# Altium PCB PCB1.PcbDoc (part 1 of 3)
Units mil, origin at the board's own origin, x right, y up, seen from the top; angles counter-clockwise.
Board outline 1649.96 x 1854.5 mil, 6 copper layers (Top Layer, Layer 2, Layer 3, Layer 4, Layer 5, Bottom Layer), stack 32.112 mil thick; 86 components, 196 nets, 681 pads, 452 vias.
Unrouted connection lines stored in the file: 66.
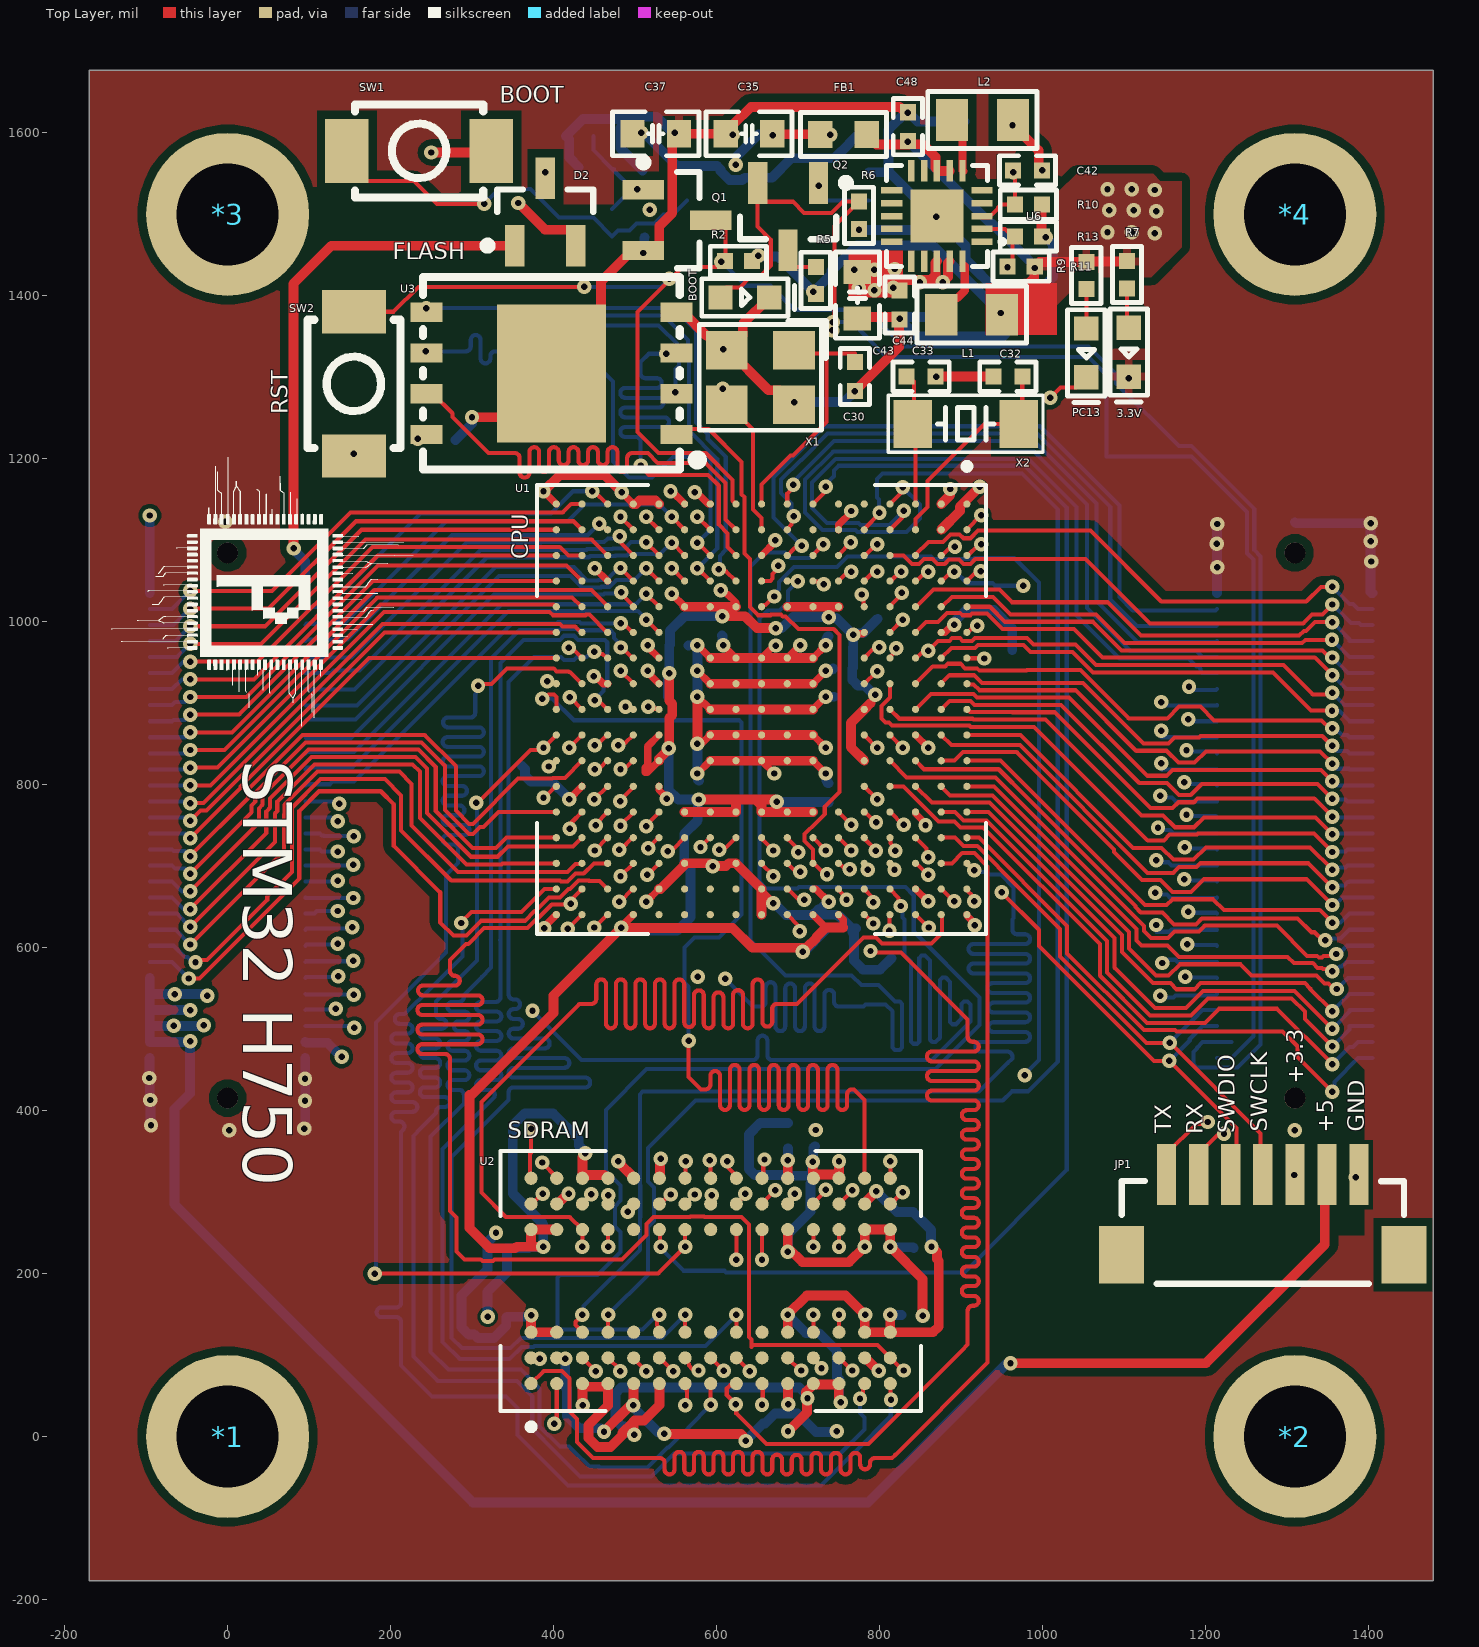
[diagram p0: Top Layer view]
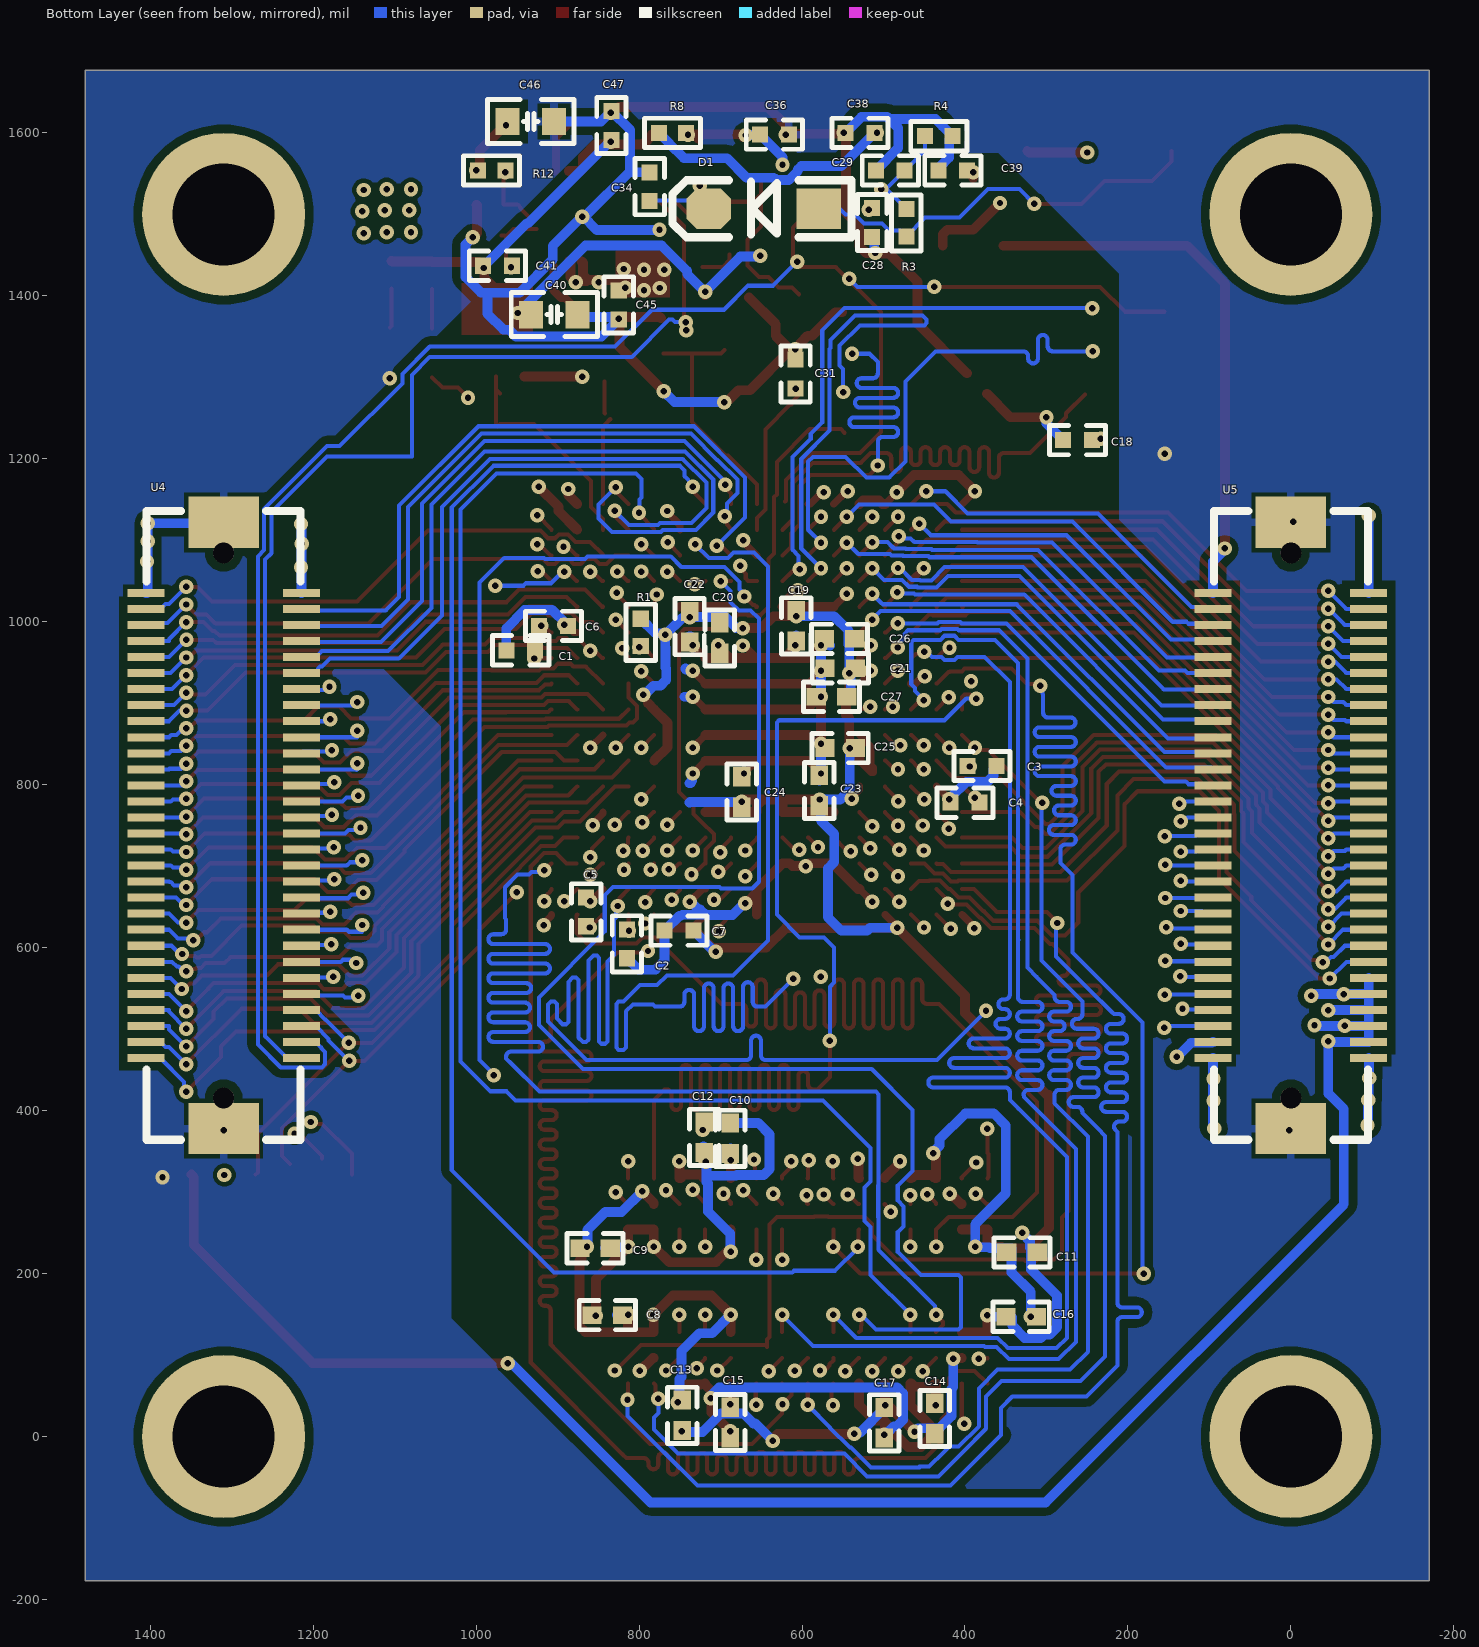
[diagram p1: Bottom Layer view, seen from below]
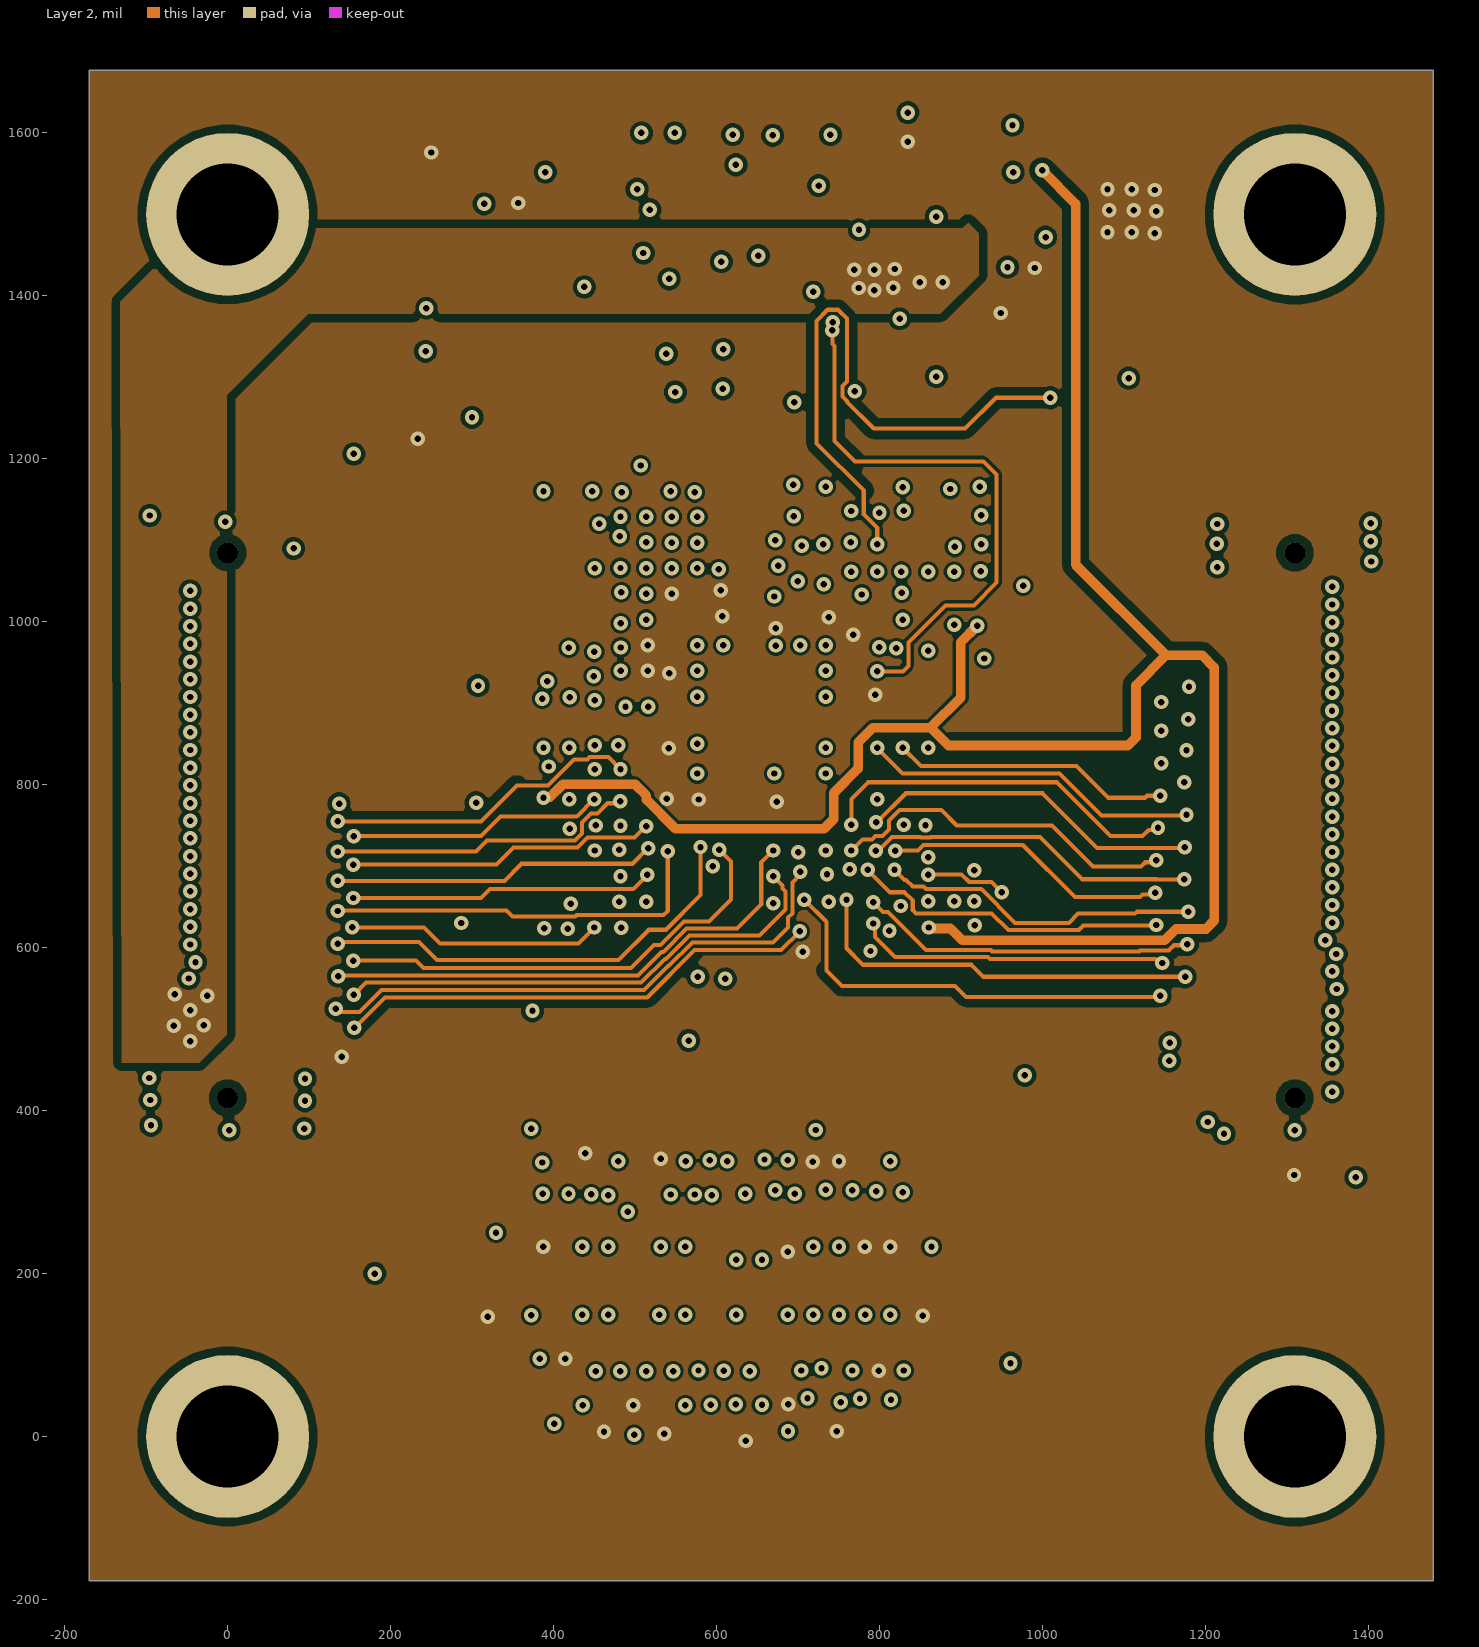
[diagram p2: Layer 2]
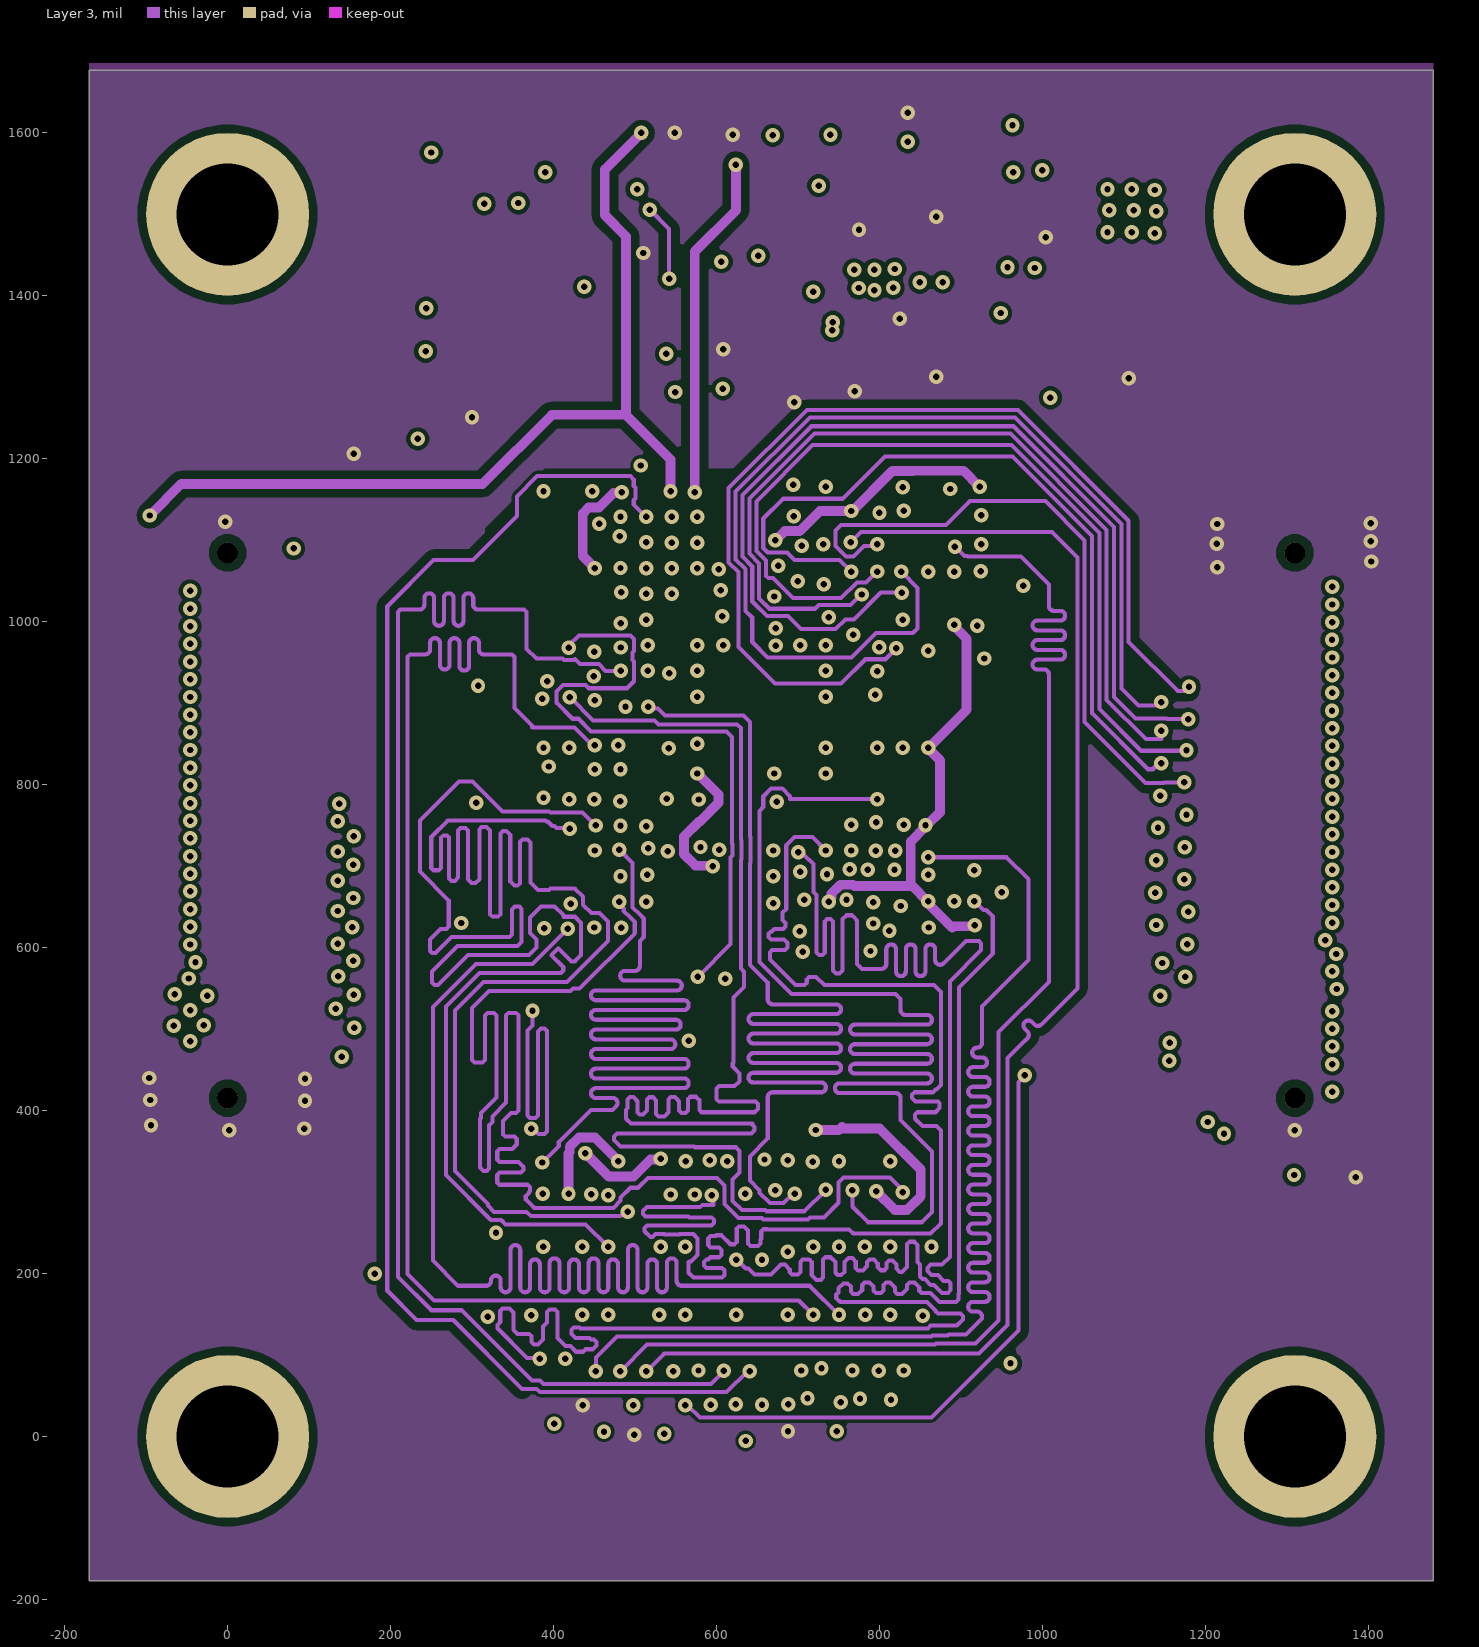
[diagram p3: Layer 3]
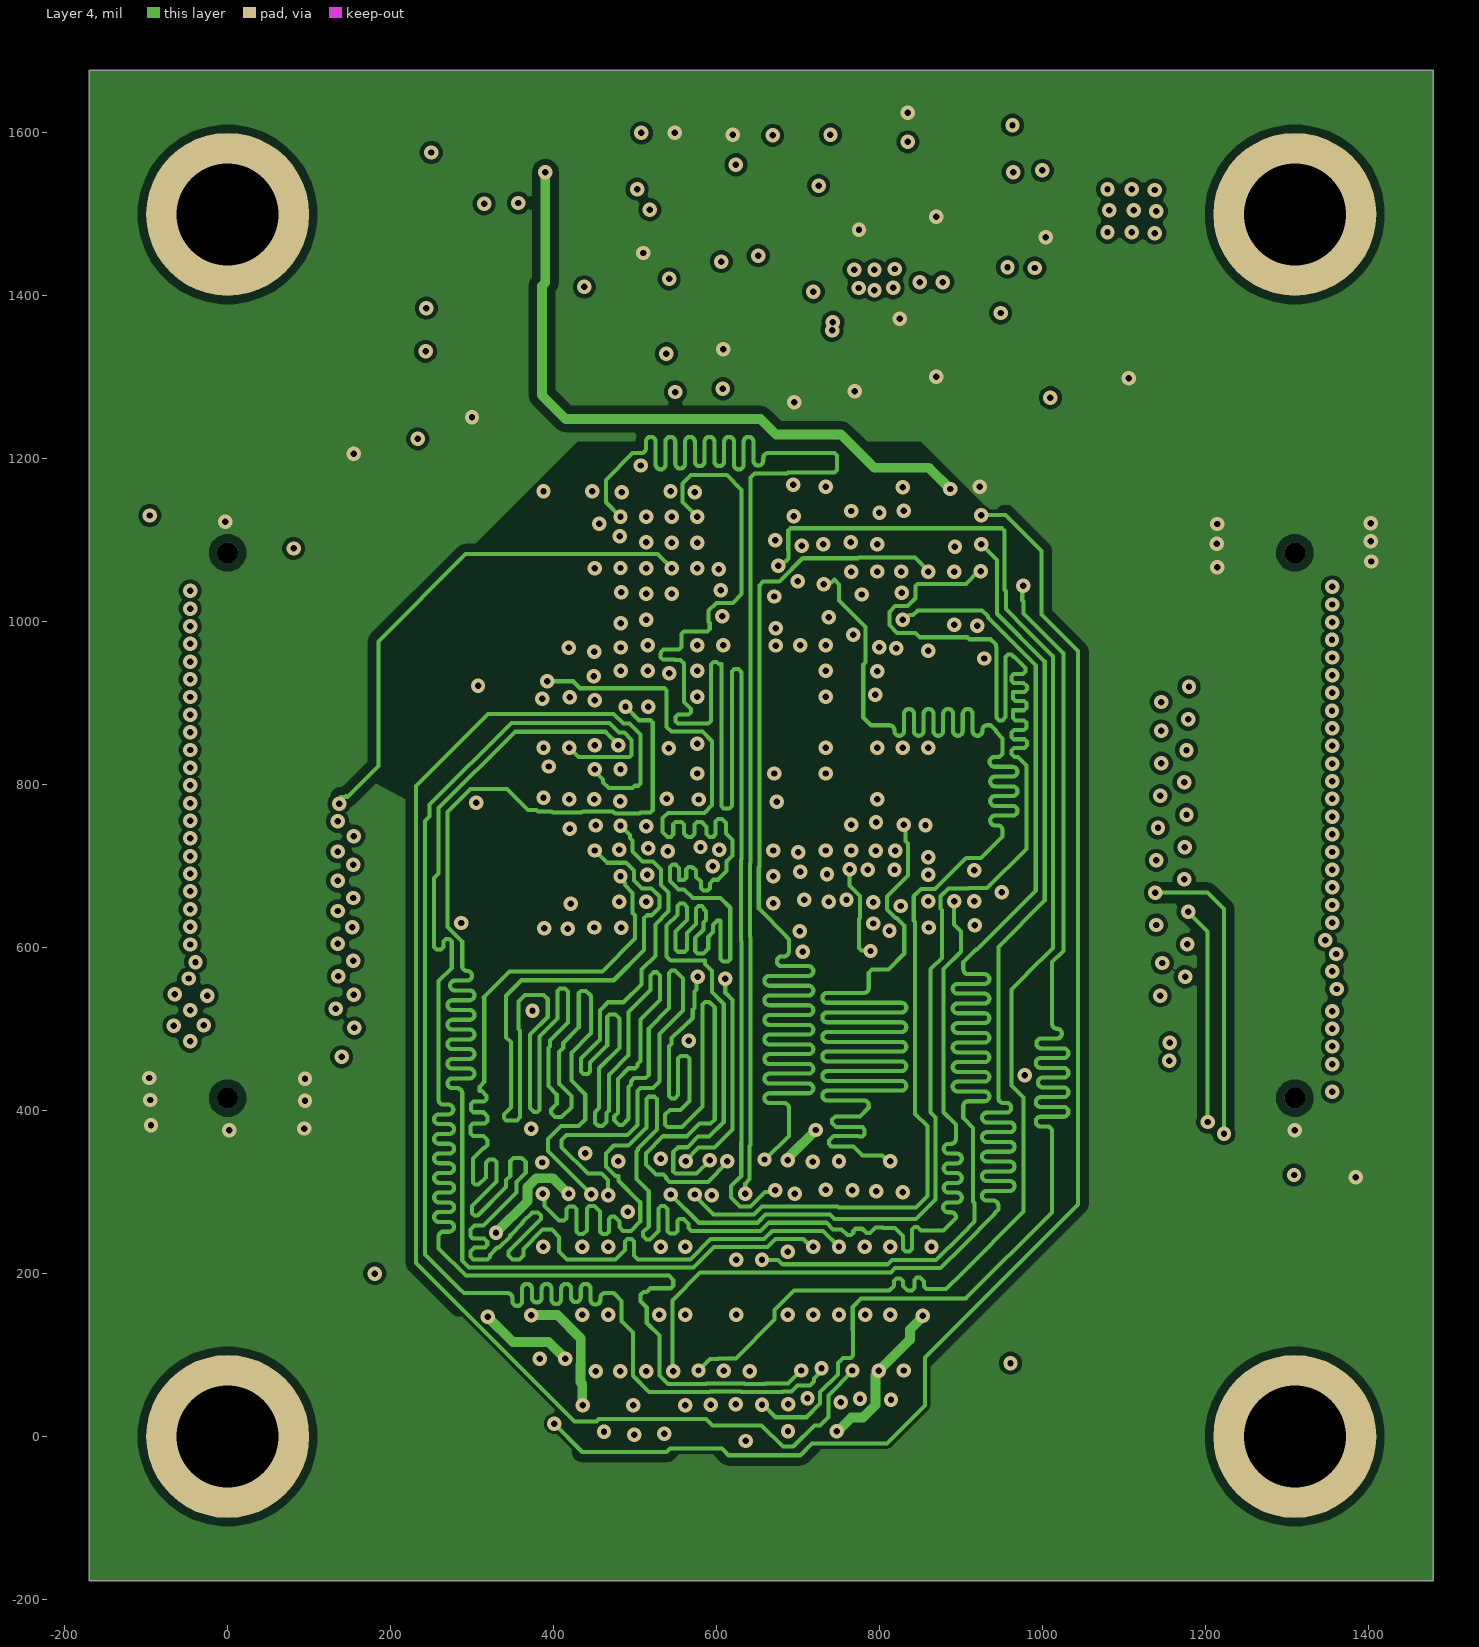
[diagram p4: Layer 4]
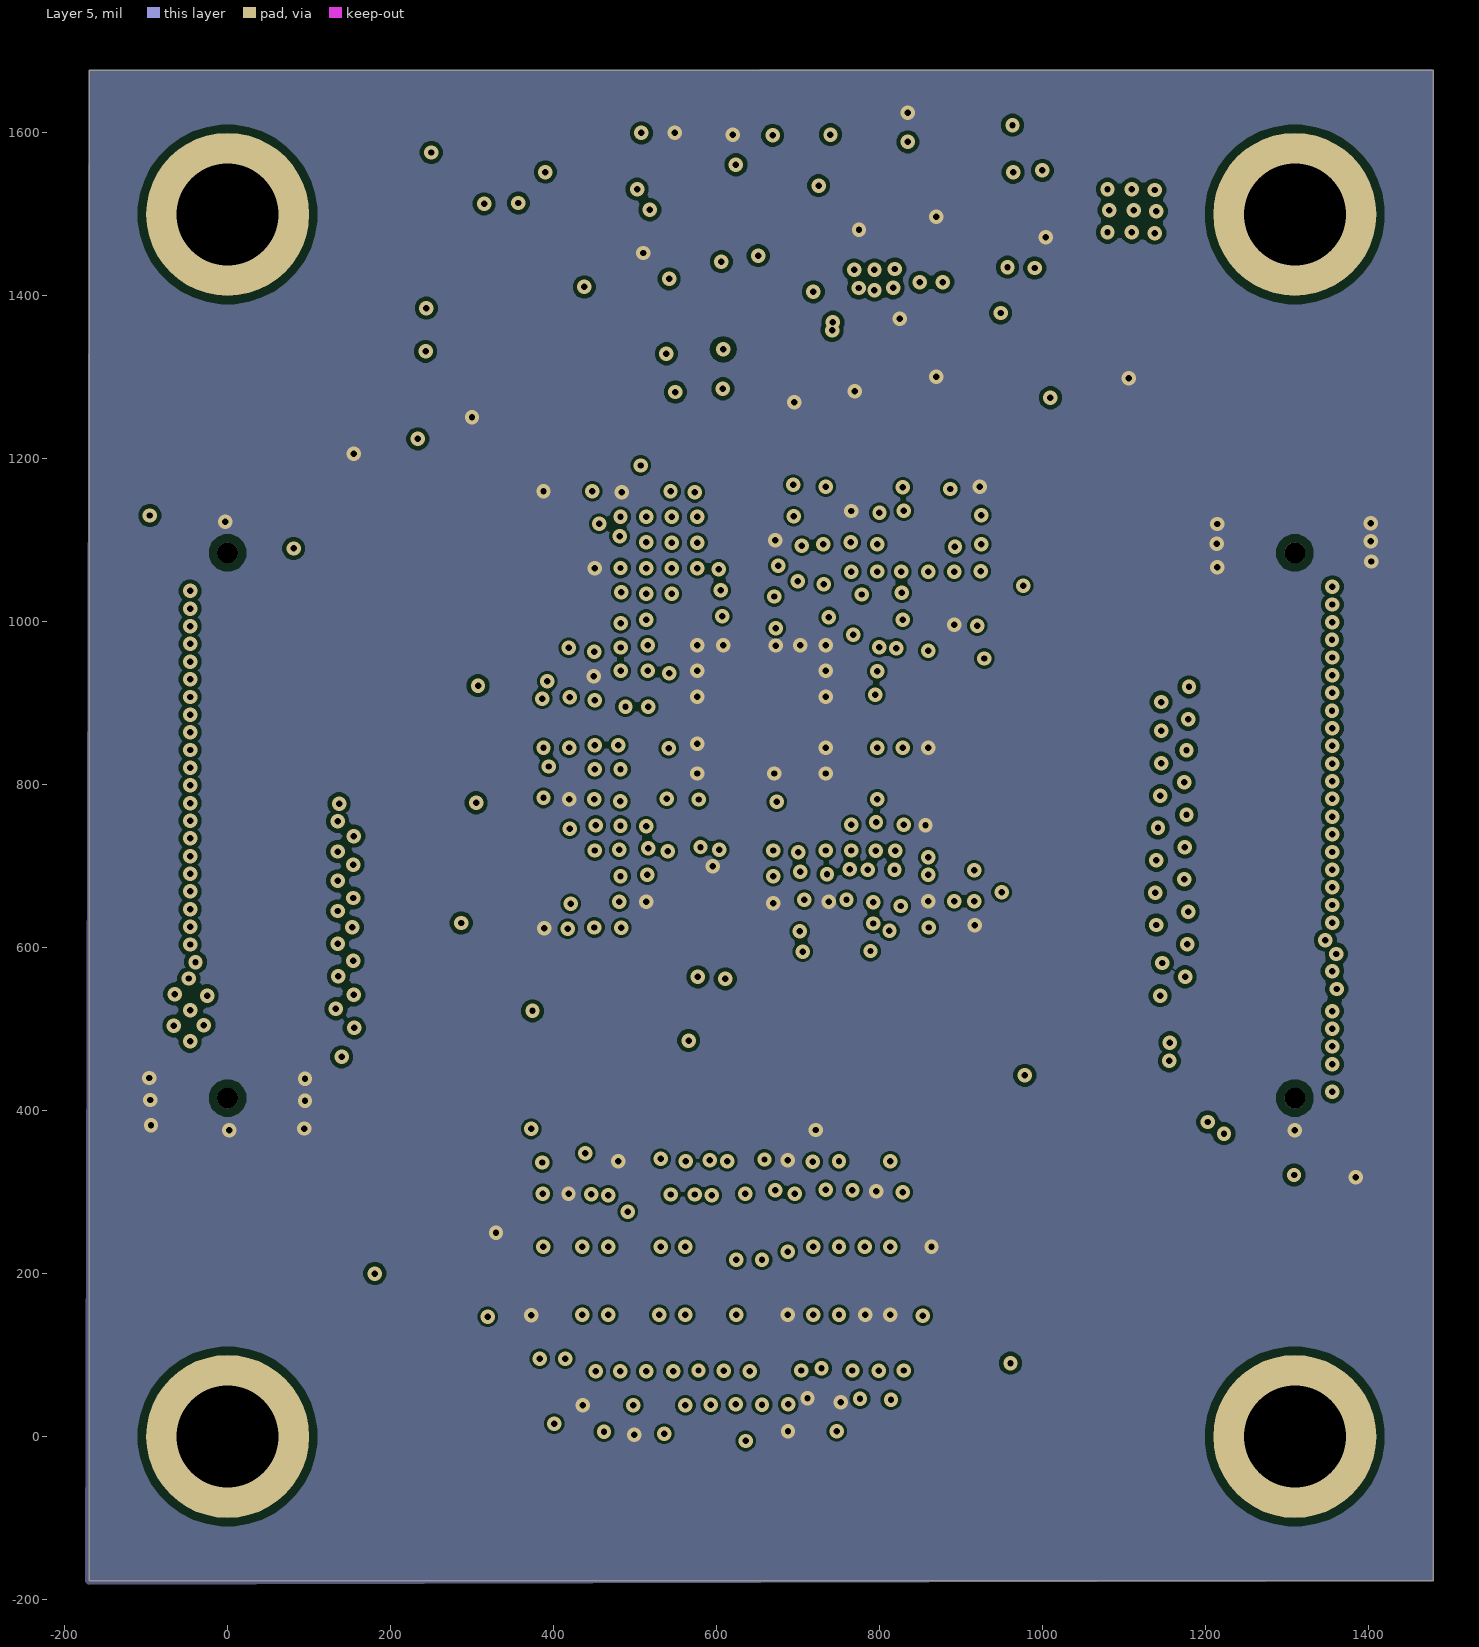
[diagram p5: Layer 5]
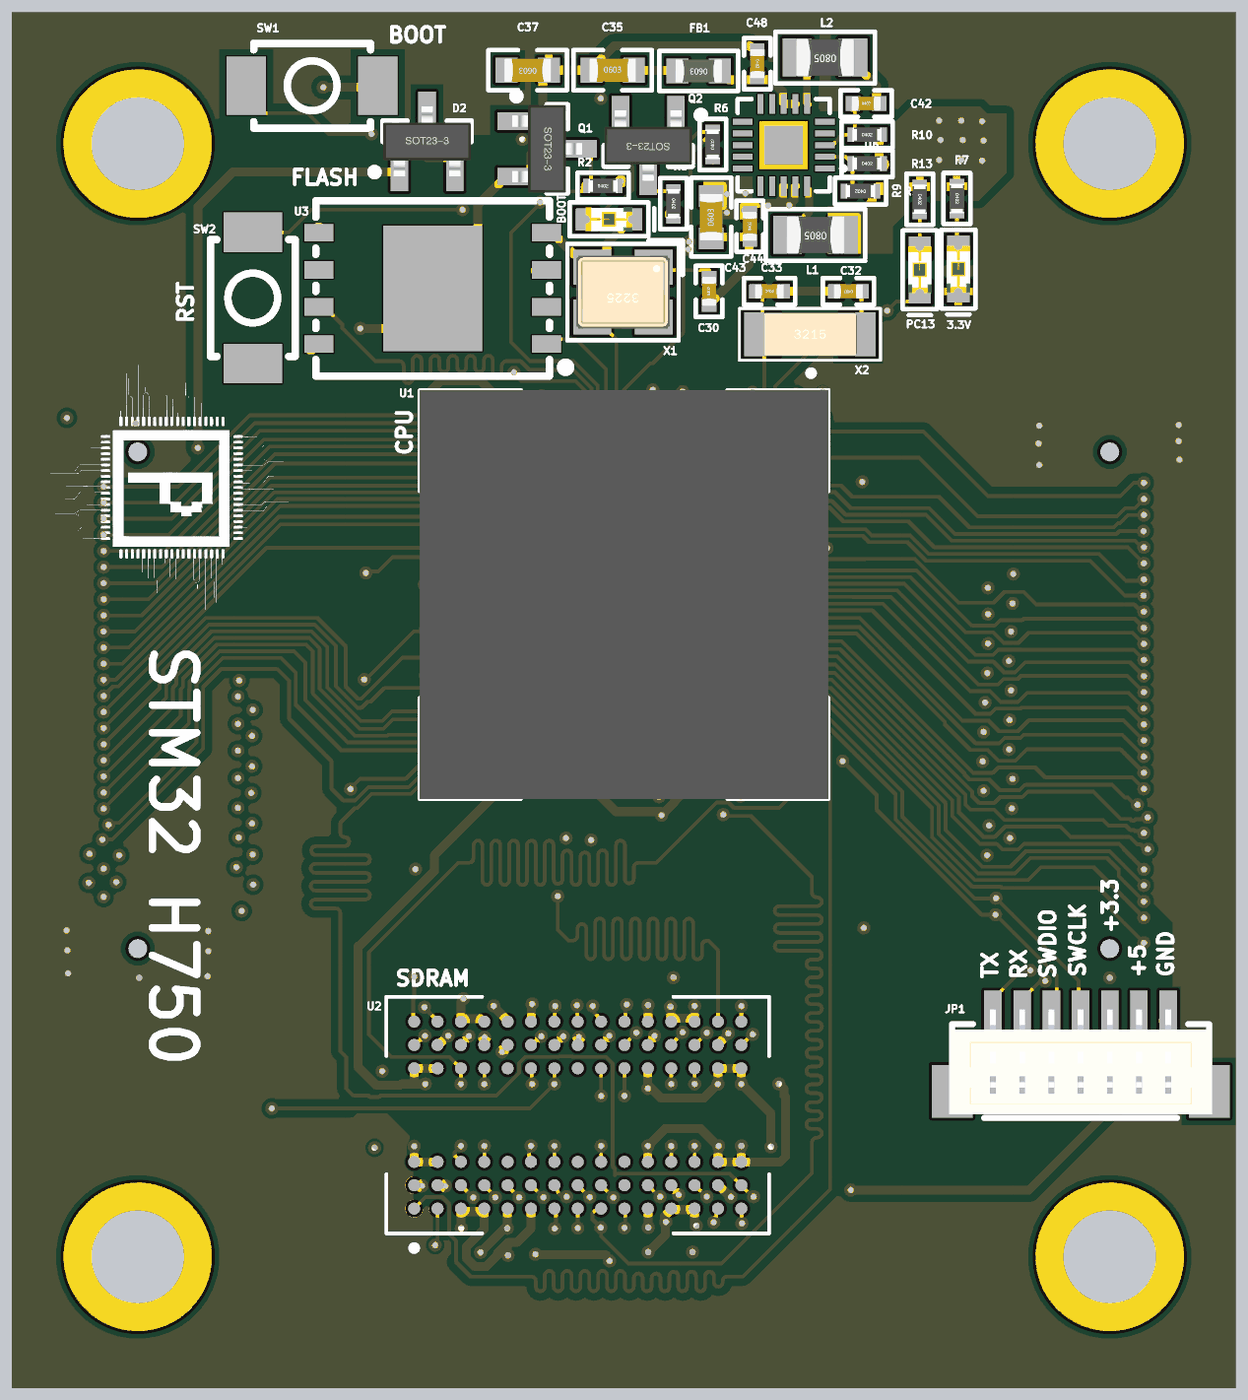
[diagram p8: 3D render of the assembled board from above, using the file's embedded part models]
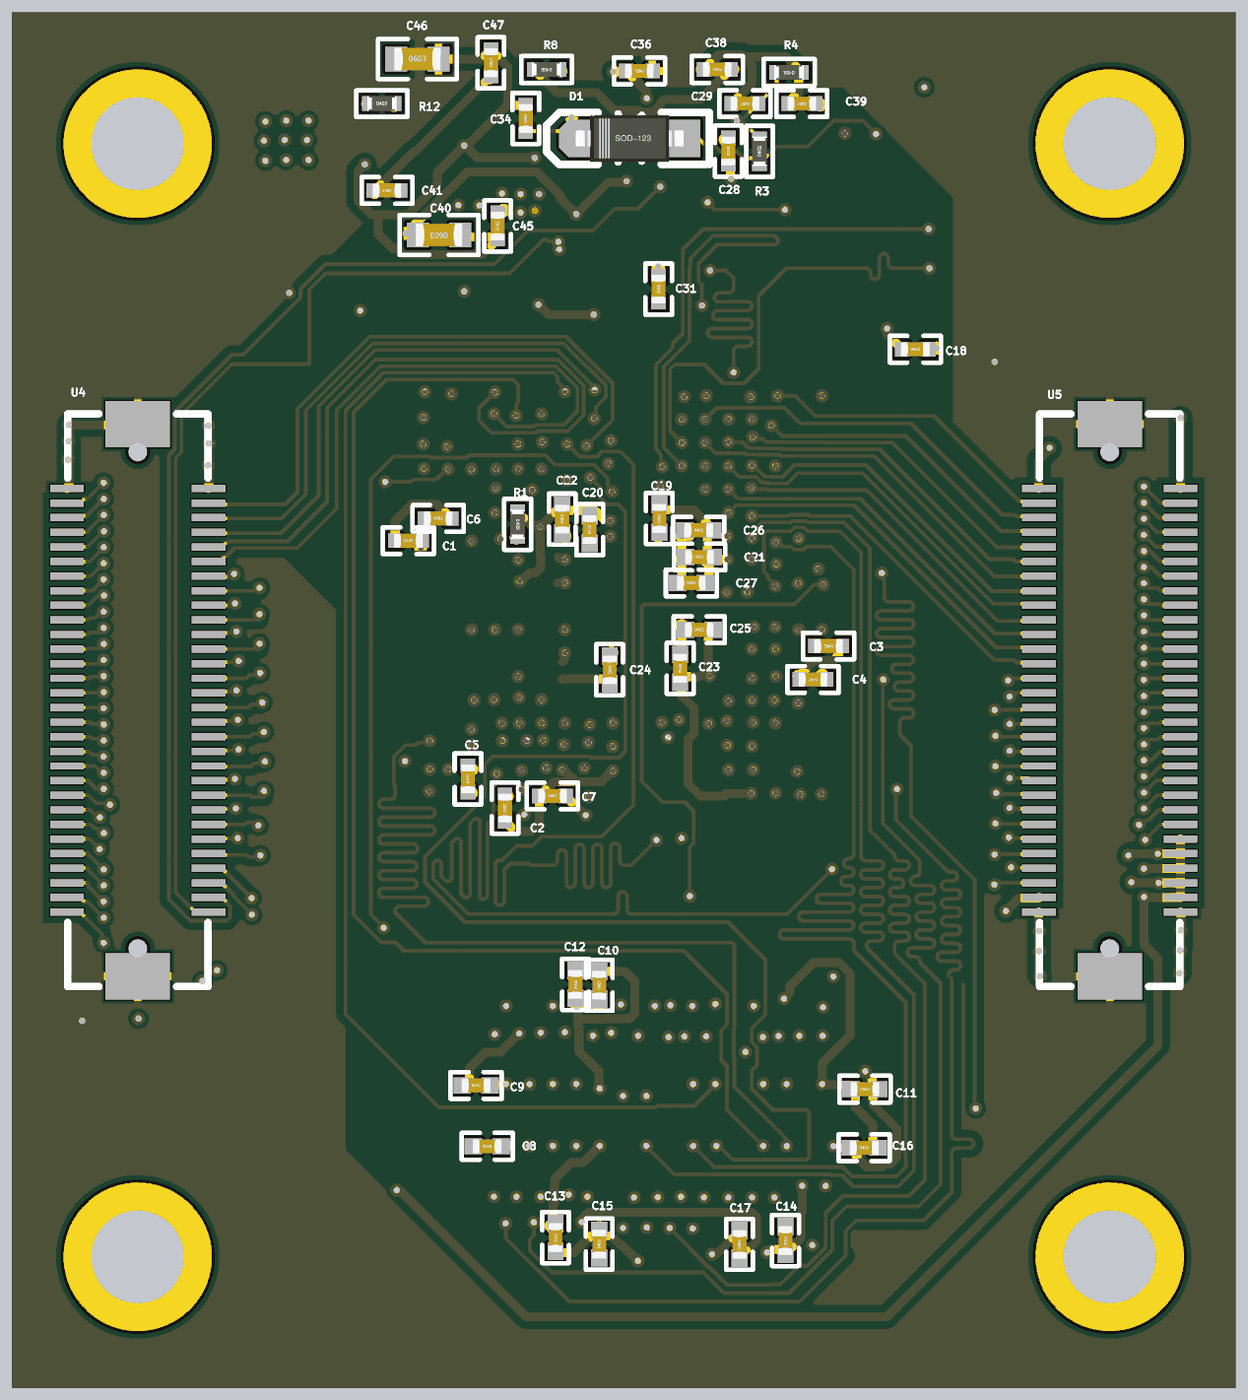
[diagram p9: 3D render of the assembled board from below, using the file's embedded part models]

## Layer stack, top to bottom
Top Solder: solder mask 0.4, Solder Resist, Dk 3.5
Top Layer: signal copper 1.4
Dielectric 4: prepreg 2.8, PP-006, Dk 4.1
Layer 2: signal copper 1.378
Dielectric 2: prepreg 2.8, PP-006, Dk 4.1
Layer 3: signal copper 1.378
Dielectric 1: dielectric 12.6, FR-4, Dk 4.8
Layer 4: signal copper 1.378
Dielectric 3: prepreg 2.8, PP-006, Dk 4.1
Layer 5: signal copper 1.378
Dielectric 5: prepreg 2.8, PP-006, Dk 4.1
Bottom Layer: signal copper 1.4
Bottom Solder: solder mask 0.4, Solder Resist, Dk 3.5

## Board outline
-169.98,-177.25 -169.98,1677.25 1479.98,1677.25 1479.98,-177.25

## Design rules (kind name [scope] priority, off if disabled: settings)
Clearance bga_room [WithinRoom('room_sdram') or WithinRoom('room_stm32')] p1: gap=3.5 ignorepadtopadclearanceinfootprint=FALSE
Clearance via_inpoly [IsVia vs InPoly] p2: gap=5 ignorepadtopadclearanceinfootprint=FALSE
Clearance poly-poly [inpoly] p3: gap=10 ignorepadtopadclearanceinfootprint=FALSE
Clearance [All] p4: gap=4 ignorepadtopadclearanceinfootprint=FALSE
DiffPairsRouting [All] p1: maxlimit=5 minlimit=5 mostfreqgap=5 toplayer_minwidth=15 toplayer_maxwidth=15 toplayer_prefwidth=15 midlayer1_minwidth=15 midlayer1_maxwidth=15 midlayer1_prefwidth=15 midlayer2_minwidth=15 midlayer2_maxwidth=15 midlayer2_prefwidth=15 midlayer3_minwidth=15 midlayer3_maxwidth=15 midlayer3_prefwidth=15 midlayer4_minwidth=15 midlayer4_maxwidth=15 midlayer4_prefwidth=15 bottomlayer_minwidth=15 bottomlayer_maxwidth=15 bottomlayer_prefwidth=15 maxuncoupledlength=500
PlaneClearance [All] p1: clearance=7
PlaneConnect [All] p1: pad.planeconnectstyle=Relief pad.reliefexpansion=20 pad.reliefentries=4 pad.reliefconductorwidth=10 pad.reliefairgap=10 via.planeconnectstyle=Direct via.reliefexpansion=20 via.reliefentries=4 via.reliefconductorwidth=10 via.reliefairgap=10
PolygonConnect [All] p1: thpad.connectstyle=Relief thpad.reliefconductorwidth=10 thpad.reliefentries=4 thpad.polygonreliefangle="90 Angle" thpad.airgapwidth=10 smdpad.connectstyle=Relief smdpad.reliefconductorwidth=10 smdpad.reliefentries=4 smdpad.polygonreliefangle="90 Angle" smdpad.airgapwidth=5 via.connectstyle=Direct via.reliefconductorwidth=10 via.reliefentries=4 via.polygonreliefangle="90 Angle" via.airgapwidth=10
RoomDefinition room_stm32 [InComponentClass('Room Definition 1')] p1: confinementstyle=ConfineIn formatcopy=TRUE lockcomponents=FALSE outline 329.54,566.55 329.54,1218.44 981.43,1218.44 981.43,566.55
RoomDefinition room_sdram [InComponentClass('Room Definition 2')] p2: confinementstyle=ConfineIn formatcopy=TRUE lockcomponents=FALSE outline 284.77,-18.8 284.77,400.8 901.23,400.8 901.23,-18.8
RoutingVias small_vias [All] p1: holewidth=7.9 width=17.7 viastyle="Through Hole" minholewidth=7.9 minwidth=17.7 maxholewidth=7.9 maxwidth=17.7
SilkToSolderMaskClearance [IsPad] p1: minsilkscreentomaskgap=2 clearancetoexposedcopper=TRUE
SolderMaskExpansion [All] p1: expansion=4 istentingtop=FALSE
Width power [InNetClass('PWR')] p1: maxlimit=12 minlimit=12 preferedwidth=12
Width signal [All] p2: maxlimit=12 minlimit=5 preferedwidth=5
26 further rules are at their usual default settings.

## Classes and differential pairs
net class flash: "QSPI_BK1_IO0 / PF8" "QSPI_BK1_IO1 / PF9" "QSPI_BK1_IO2 / PF7" "QSPI_BK1_IO3 / PF6" "QSPI_BK1_NCS / PG6" "QSPI_CLK / PF10"
net class SDRAM: "FMC_A0 / PF0" "FMC_A1 / PF1" "FMC_A2 / PF2" "FMC_A3 / PF3" "FMC_A4 / PF4" "FMC_A5 / PF5" "FMC_A6 / PF12" "FMC_A7 / PF13" "FMC_A8 / PF14" "FMC_A9 / PF15" "FMC_A10 / PG0" "FMC_A11 / PG1" "FMC_BA0 / PG4" "FMC_BA1 / PG5" "FMC_D0 / PD14" "FMC_D1 / PD15" "FMC_D2 / PD0" "FMC_D3 / PD1" "FMC_D4 / PE7" "FMC_D5 / PE8" "FMC_D6 / PE9" "FMC_D7 / PE10" "FMC_D8 / PE11" "FMC_D9 / PE12" "FMC_D10 / PE13" "FMC_D11 / PE14" "FMC_D12 / PE15" "FMC_D13 / PD8" "FMC_D14 / PD9" "FMC_D15 / PD10" "FMC_D16 / PH8" "FMC_D17 / PH9" "FMC_D18 / PH10" "FMC_D19 / PH11" "FMC_D20 / PH12" "FMC_D21 / PH13" "FMC_D22 / PH14" "FMC_D23 / PH15" "FMC_D24 / PI0" "FMC_D25 / PI1" "FMC_D26 / PI2" "FMC_D27 / PI3" "FMC_D28 / PI6" "FMC_D29 / PI7" "FMC_D30 / PI9" "FMC_D31 / PI10" "FMC_NBL0 / PE0" "FMC_NBL1 / PE1" "FMC_NBL2 / PI4" "FMC_NBL3 / PI5" "FMC_SDCKE0 / PH2" "FMC_SDCLK / PG8" "FMC_SDNCAS / PG15" "FMC_SDNE0 / PH3" "FMC_SDNRAS / PF11" "FMC_SDNWE / PC0"
component class "Room Definition 2": U2
component class "Room Definition 1": U1
net class PWR: +1.8 +3.3 +5 GND VBAT VBAT-EXT VDDA VREF

## Components (designator, comment, footprint, x,y, rotation, side; value= is the part's Value field where it differs from the comment)
3.3V "红色" LED0603_G 1106,1331 r270 top (schematic designator LED2)
*1 "M3" "M3 125X200"#1 0,0 r0 top
*2 "M3" "M3 125X200"#2 1357,8 r0 top
*3 "M3" "M3 125X200"#3 -62,1504 r0 top
*4 "M3" "M3 125X200"#4 1394,1532 r0 top
BOOT "绿色" LED0603_G 635,1398 r0 top (schematic designator LED1)
C1 "2.2UF" C0402_L 945.28,965 r180 bottom
C2 "2.2UF" C0402_L 815,604.72 r90 bottom
C3 "2.2UF" C0402_L 379,823 r0 bottom
C4 "0.1UF" C0402_L 400,778 r0 bottom
C5 "0.1UF" C0402_L 865,644 r90 bottom
C6 "0.1UF" C0402_L 905,995 r180 bottom
C7 "1UF" C0402_L 751,621 r180 bottom
C8 "0.1UF" C0402_M 839,149 r0 bottom
C9 "0.1UF" C0402_M 854,231 r180 bottom
C10 "0.1UF" C0402_M 688,366 r90 bottom
C11 "0.1UF" C0402_M 330,226 r0 bottom
C12 "0.1UF" C0402_M 720,367.19 r270 bottom
C13 "0.1UF" C0402_M 747,26 r270 bottom
C14 "0.1UF" C0402_M 437,22 r270 bottom
C15 "0.1UF" C0402_M 688,17.19 r90 bottom
C16 "0.1UF" C0402_M 331,147 r180 bottom
C17 "0.1UF" C0402_M 499,16.81 r90 bottom
C18 "0.1UF" C0402_L 262,1223 r180 bottom
C19 "0.1UF" C0402_M 607,995 r90 bottom
C20 "0.1UF" C0402_M 701,980 r90 bottom
C21 "0.1UF" C0402_M 553,943 r180 bottom
C22 "0.1UF" C0402_M 738,994 r90 bottom
C23 "0.1UF" C0402_M 579,793 r270 bottom
C24 "0.1UF" C0402_M 674,791 r270 bottom
C25 "0.1UF" C0402_M 553.19,845 r180 bottom
C26 "0.1UF" C0402_M 554,979 r180 bottom
C27 "0.1UF" C0402_M 563.81,908 r180 bottom
C28 "0.1UF" C0402_L 514,1490 r270 bottom
C29 "0.1UF" C0402_L 491.72,1554 r0 bottom
C30 "22PF" C0402_L 770,1301 r90 top
C31 "22PF" C0402_L 608,1304 r270 bottom
C32 "6PF" C0402_L 957.72,1301 r180 top
C33 "22PF" C0402_L 851.28,1301 r0 top
C34 "0.1UF" C0402_L 787,1534 r90 bottom
C35 "10UF" C0603_L 640,1599 r0 top
C36 "0.1UF" C0402_L 634,1598 r0 bottom
C37 "10UF" C0603_L 525.54,1599 r180 top
C38 "0.1UF" C0402_L 529,1600 r180 bottom
C39 "0.1UF" C0402_L 415,1554 r0 bottom
C40 "10UF" C0603_L 904,1377 r0 bottom
C41 "22PF" C0402_L 974,1437 r0 bottom
C42 "22PF" C0402_L 981.72,1554 r0 top
C43 "10UF" C0603_L 773,1401 r90 top
C44 "0.1UF" C0402_L 825,1388.72 r90 top
C45 "0.1UF" C0402_L 825,1389 r90 bottom
C46 "10UF" C0603_L 933,1614 r180 bottom
C47 "0.1UF" C0402_L 834,1609 r270 bottom
C48 "0.1UF" C0402_L 835,1607.72 r270 top
D1 "1N4007" SOD-123 647,1507 r0 bottom
D2 "BAT54C" SOT23-3N 390,1503 r0 top
FB1 "120R@100MHz" FB0603 756,1598 r180 top
JP1 "CON-6P" SH1.0-LT-7P 1270.73,272.24 r0 top
L1 "2.2uH" L0805 913.4,1377 r180 top
L2 "2.2uH" L0805 926.4,1616 r180 top
PC13 "绿色" LED0603_G 1054,1330 r270 top (schematic designator LED3)
Q1 "SS8050" SOT23-3N 551.66,1493 r270 top
Q2 "SS8050" SOT23-3N 688,1497.34 r180 top
R1 "10K" R0402_L 798,987 r270 bottom
R2 "10k" R0402_L 627,1443 r0 top
R3 "10k" R0402_L 472,1489.73 r90 bottom
R4 "10k" R0402_L 432.27,1596 r0 bottom
R5 "1k" R0402_L 722,1419 r270 top
R6 "10k" R0402_L 775,1499 r90 top
R7 "1k" R0402_L 1104,1426 r270 top
R8 "0" R0402_L 759,1600 r0 bottom
R9 "1k" R0402_L 1054,1425 r270 top
R10 "51k" R0402_L 983,1512 r0 top
R11 "100k" R0402_L 974,1436 r180 top
R12 "100k" R0402_L 981,1554 r180 bottom
R13 "22k" R0402_L 983,1473 r0 top
SW1 "GT-TC029B-H020-L1N" SW-SMD_L3.9-W2.9-P4.15-LS5.0 235,1578 r180 top
SW2 "GT-TC029B-H020-L1N" SW-SMD_L3.9-W2.9-P4.15-LS5.0 155,1292 r270 top
U1 "STM32H750XBH6" IC_STM32H750XBH6 655.48,892.5 r270 top
U2 "MT48LC4M32B2B5-6A:L" BGA90C80P9X15_800X1300X100N 593,191 r90 top
U3 "W25Q256JWEIQ_C2980994" WSON-8_L8.0-W6.0-P1.27-TL-EP-1 403.36,1305 r180 top
U4 "BTB0.5-60F-2.0G" CONN-SMD_60P-P0.50_BTB0.5-60F-2.0G 1310,750 r90 bottom locked
U5 "BTB0.5-60F-2.0G" CONN-SMD_60P-P0.50_BTB0.5-60F-2.0G 0,750 r90 bottom locked
U6 "TMI7003B" QFN-20_L3.0-W3.0-P0.40-BL-EP1.7 878,1498 r90 top
X1 "26M" XTAL-3225-4P 654,1300 r180 top
X2 "32.768KHZ" XTAL-3215-2P 906,1243 r0 top

## Footprints (in the part's own frame and the unit in brackets; to place one, negate y for a bottom-side part, rotate by r counter-clockwise, add the part's x,y. Pads: shape width x height; smd on the part's side, far side on the other; paste and mask are expansions set on the pad)
BGA90C80P9X15_800X1300X100N [mm]
  round 0.41 smd: A1(-3.2,5.6) A2(-2.4,5.6) A3(-1.6,5.6) A7(1.6,5.6) A8(2.4,5.6) A9(3.2,5.6) B1(-3.2,4.8) B2(-2.4,4.8) B3(-1.6,4.8) B7(1.6,4.8) B8(2.4,4.8) B9(3.2,4.8) C1(-3.2,4) C2(-2.4,4) C3(-1.6,4) C7(1.6,4) C8(2.4,4) C9(3.2,4) D1(-3.2,3.2) D2(-2.4,3.2) D3(-1.6,3.2) D7(1.6,3.2) D8(2.4,3.2) D9(3.2,3.2) E1(-3.2,2.4) E2(-2.4,2.4) E3(-1.6,2.4) E7(1.6,2.4) E8(2.4,2.4) E9(3.2,2.4) F1(-3.2,1.6) F2(-2.4,1.6) F3(-1.6,1.6) F7(1.6,1.6) F8(2.4,1.6) F9(3.2,1.6) G1(-3.2,0.8) G2(-2.4,0.8) G3(-1.6,0.8) G7(1.6,0.8) G8(2.4,0.8) G9(3.2,0.8) H1(-3.2,0) H2(-2.4,0) H3(-1.6,0) H7(1.6,0) H8(2.4,0) H9(3.2,0) J1(-3.2,-0.8) J2(-2.4,-0.8) J3(-1.6,-0.8) J7(1.6,-0.8) J8(2.4,-0.8) J9(3.2,-0.8) K1(-3.2,-1.6) K2(-2.4,-1.6) K3(-1.6,-1.6) K7(1.6,-1.6) K8(2.4,-1.6) K9(3.2,-1.6) L1(-3.2,-2.4) L2(-2.4,-2.4) L3(-1.6,-2.4) L7(1.6,-2.4) L8(2.4,-2.4) L9(3.2,-2.4) M1(-3.2,-3.2) M2(-2.4,-3.2) M3(-1.6,-3.2) M7(1.6,-3.2) M8(2.4,-3.2) M9(3.2,-3.2) N1(-3.2,-4) N2(-2.4,-4) N3(-1.6,-4) N7(1.6,-4) N8(2.4,-4) N9(3.2,-4) P1(-3.2,-4.8) P2(-2.4,-4.8) P3(-1.6,-4.8) P7(1.6,-4.8) P8(2.4,-4.8) P9(3.2,-4.8) R1(-3.2,-5.6) R2(-2.4,-5.6) R3(-1.6,-5.6) R7(1.6,-5.6) R8(2.4,-5.6) R9(3.2,-5.6)
  silkscreen extent -4.65,-6.55 4.05,6.55
C0402_L [mm]
  rect 0.5x0.5 smd: 1(-0.45,0) 2(0.45,0)
  silkscreen extent -0.87,-0.46 0.88,0.46, body extent -0.5,-0.25 0.5,0.25, height 0.5
C0402_M [mm]
  rect 0.6x0.55 smd: 1(-0.475,0) 2(0.475,0)
  silkscreen extent -0.87,-0.46 0.87,0.46, body extent -0.5,-0.25 0.5,0.25, height 0.5
C0603_L [mm]
  rect 0.75x0.85 smd: 1(-0.725,0) 2(0.725,0)
  silkscreen extent -1.35,-0.69 1.35,0.69, body extent -0.8,-0.4 0.8,0.4, height 0.8
CONN-SMD_60P-P0.50_BTB0.5-60F-2.0G [mm]
  rect 0.25x1.15 smd paste+0 mask+0.051: 1(-7.25,-2.425) 2(-7.25,2.425) 3(-6.75,-2.425) 4(-6.75,2.425) 5(-6.25,-2.425) 6(-6.25,2.425) 7(-5.75,-2.425) 8(-5.75,2.425) 9(-5.25,-2.425) 10(-5.25,2.425) 11(-4.75,-2.425) 12(-4.75,2.425) 13(-4.25,-2.425) 14(-4.25,2.425) 15(-3.75,-2.425) 16(-3.75,2.425) 17(-3.25,-2.425) 18(-3.25,2.425) 19(-2.75,-2.425) 20(-2.75,2.425) 21(-2.25,-2.425) 22(-2.25,2.425) 23(-1.75,-2.425) 24(-1.75,2.425) 25(-1.25,-2.425) 26(-1.25,2.425) 27(-0.75,-2.425) 28(-0.75,2.425) 29(-0.25,-2.425) 30(-0.25,2.425) 31(0.25,-2.425) 32(0.25,2.425) 33(0.75,-2.425) 34(0.75,2.425) 35(1.25,-2.425) 36(1.25,2.425) 37(1.75,-2.425) 38(1.75,2.425) 39(2.25,-2.425) 40(2.25,2.425) 41(2.75,-2.425) 42(2.75,2.425) 43(3.25,-2.425) 44(3.25,2.425) 45(3.75,-2.425) 46(3.75,2.425) 47(4.25,-2.425) 48(4.25,2.425) 49(4.75,-2.425) 50(4.75,2.425) 51(5.25,-2.425) 52(5.25,2.425) 53(5.75,-2.425) 54(5.75,2.425) 55(6.25,-2.425) 56(6.25,2.425) 57(6.75,-2.425) 58(6.75,2.425) 59(7.25,-2.425) 60(7.25,2.425)
  rect 1.6x2.2 smd paste+0 mask+0.051: 61(-9.45,0) 62(9.45,0)
  round 0.65 hole 0.65 unplated paste+0: ""(-8.5,0) ""(8.5,0)
  silkscreen extent -9.8,-2.4 9.8,2.4
FB0603 [mm]
  rect 0.75x0.85 smd: 1(-0.725,0) 2(0.725,0)
  silkscreen extent -1.35,-0.69 1.35,0.69, body extent -0.8,-0.4 0.8,0.4, height 0.8
IC_STM32H750XBH6 [mm]
  round 0.225 smd paste+0.012 mask+0.032: A1(-6.4,6.4) A2(-5.6,6.4) A3(-4.8,6.4) A4(-4,6.4) A5(-3.2,6.4) A6(-2.4,6.4) A7(-1.6,6.4) A8(-0.8,6.4) A9(0,6.4) A10(0.8,6.4) A11(1.6,6.4) A12(2.4,6.4) A13(3.2,6.4) A14(4,6.4) A15(4.8,6.4) A16(5.6,6.4) A17(6.4,6.4) B1(-6.4,5.6) B2(-5.6,5.6) B3(-4.8,5.6) B4(-4,5.6) B5(-3.2,5.6) B6(-2.4,5.6) B7(-1.6,5.6) B8(-0.8,5.6) B9(0,5.6) B10(0.8,5.6) B11(1.6,5.6) B12(2.4,5.6) B13(3.2,5.6) B14(4,5.6) B15(4.8,5.6) B16(5.6,5.6) B17(6.4,5.6) C1(-6.4,4.8) C2(-5.6,4.8) C3(-4.8,4.8) C4(-4,4.8) C5(-3.2,4.8) C6(-2.4,4.8) C7(-1.6,4.8) C8(-0.8,4.8) C9(0,4.8) C10(0.8,4.8) C11(1.6,4.8) C12(2.4,4.8) C13(3.2,4.8) C14(4,4.8) C15(4.8,4.8) C16(5.6,4.8) C17(6.4,4.8) D1(-6.4,4) D2(-5.6,4) D3(-4.8,4) D4(-4,4) D5(-3.2,4) D6(-2.4,4) D7(-1.6,4) D8(-0.8,4) D9(0,4) D10(0.8,4) D11(1.6,4) D12(2.4,4) D13(3.2,4) D14(4,4) D15(4.8,4) D16(5.6,4) D17(6.4,4) E1(-6.4,3.2) E2(-5.6,3.2) E3(-4.8,3.2) E4(-4,3.2) E5(-3.2,3.2) E6(-2.4,3.2) E7(-1.6,3.2) E8(-0.8,3.2) E9(0,3.2) E10(0.8,3.2) E11(1.6,3.2) E12(2.4,3.2) E13(3.2,3.2) E14(4,3.2) E15(4.8,3.2) E16(5.6,3.2) E17(6.4,3.2) F1(-6.4,2.4) F2(-5.6,2.4) F3(-4.8,2.4) F4(-4,2.4) F5(-3.2,2.4) F13(3.2,2.4) F14(4,2.4) F15(4.8,2.4) F16(5.6,2.4) F17(6.4,2.4) G1(-6.4,1.6) G2(-5.6,1.6) G3(-4.8,1.6) G4(-4,1.6) G5(-3.2,1.6) G7(-1.6,1.6) G8(-0.8,1.6) G9(0,1.6) G10(0.8,1.6) G11(1.6,1.6) G13(3.2,1.6) G14(4,1.6) G15(4.8,1.6) G16(5.6,1.6) G17(6.4,1.6) H1(-6.4,0.8) H2(-5.6,0.8) H3(-4.8,0.8) H4(-4,0.8) H5(-3.2,0.8) H7(-1.6,0.8) H8(-0.8,0.8) H9(0,0.8) H10(0.8,0.8) H11(1.6,0.8) H13(3.2,0.8) H14(4,0.8) H15(4.8,0.8) H16(5.6,0.8) H17(6.4,0.8) J1(-6.4,0) J2(-5.6,0) J3(-4.8,0) J4(-4,0) J5(-3.2,0) J7(-1.6,0) J8(-0.8,0) J9(0,0) J10(0.8,0) J11(1.6,0) J13(3.2,0) J14(4,0) J15(4.8,0) J16(5.6,0) J17(6.4,0) K1(-6.4,-0.8) K2(-5.6,-0.8) K3(-4.8,-0.8) K4(-4,-0.8) K5(-3.2,-0.8) K7(-1.6,-0.8) K8(-0.8,-0.8) K9(0,-0.8) K10(0.8,-0.8) K11(1.6,-0.8) K13(3.2,-0.8) K14(4,-0.8) K15(4.8,-0.8) K16(5.6,-0.8) K17(6.4,-0.8) L1(-6.4,-1.6) L2(-5.6,-1.6) L3(-4.8,-1.6) L4(-4,-1.6) L5(-3.2,-1.6) L7(-1.6,-1.6) L8(-0.8,-1.6) L9(0,-1.6) L10(0.8,-1.6) L11(1.6,-1.6) L13(3.2,-1.6) L14(4,-1.6) L15(4.8,-1.6) L16(5.6,-1.6) L17(6.4,-1.6) M1(-6.4,-2.4) M2(-5.6,-2.4) M3(-4.8,-2.4) M4(-4,-2.4) M5(-3.2,-2.4) M13(3.2,-2.4) M14(4,-2.4) M15(4.8,-2.4) M16(5.6,-2.4) M17(6.4,-2.4) N1(-6.4,-3.2) N2(-5.6,-3.2) N3(-4.8,-3.2) N4(-4,-3.2) N5(-3.2,-3.2) N6(-2.4,-3.2) N7(-1.6,-3.2) N8(-0.8,-3.2) N9(0,-3.2) N10(0.8,-3.2) N11(1.6,-3.2) N12(2.4,-3.2) N13(3.2,-3.2) N14(4,-3.2) N15(4.8,-3.2) N16(5.6,-3.2) N17(6.4,-3.2) P1(-6.4,-4) P2(-5.6,-4) P3(-4.8,-4) P4(-4,-4) P5(-3.2,-4) P6(-2.4,-4) P7(-1.6,-4) P8(-0.8,-4) P9(0,-4) P10(0.8,-4) P11(1.6,-4) P12(2.4,-4) P13(3.2,-4) P14(4,-4) P15(4.8,-4) P16(5.6,-4) P17(6.4,-4) R1(-6.4,-4.8) R2(-5.6,-4.8) R3(-4.8,-4.8) R4(-4,-4.8) R5(-3.2,-4.8) R6(-2.4,-4.8) R7(-1.6,-4.8) R8(-0.8,-4.8) R9(0,-4.8) R10(0.8,-4.8) R11(1.6,-4.8) R12(2.4,-4.8) R13(3.2,-4.8) R14(4,-4.8) R15(4.8,-4.8) R16(5.6,-4.8) R17(6.4,-4.8) T1(-6.4,-5.6) T2(-5.6,-5.6) T3(-4.8,-5.6) T4(-4,-5.6) T5(-3.2,-5.6) T6(-2.4,-5.6) T7(-1.6,-5.6) T8(-0.8,-5.6) T9(0,-5.6) T10(0.8,-5.6) T11(1.6,-5.6) T12(2.4,-5.6) T13(3.2,-5.6) T14(4,-5.6) T15(4.8,-5.6) T16(5.6,-5.6) T17(6.4,-5.6) U1(-6.4,-6.4) U2(-5.6,-6.4) U3(-4.8,-6.4) U4(-4,-6.4) U5(-3.2,-6.4) U6(-2.4,-6.4) U7(-1.6,-6.4) U8(-0.8,-6.4) U9(0,-6.4) U10(0.8,-6.4) U11(1.6,-6.4) U12(2.4,-6.4) U13(3.2,-6.4) U14(4,-6.4) U15(4.8,-6.4) U16(5.6,-6.4) U17(6.4,-6.4)
  silkscreen extent -7.67,-7 7,7, body extent -7,-7 7,7, height 1.1
L0805 [mm]
  rect 1x1.3 smd: 1(-0.95,0) 2(0.95,0)
  silkscreen extent -1.7,-0.89 1.7,0.89, body extent -1,-0.65 1,0.65, height 1.3
LED0603_G [mil]
  rect 30x30 smd: 1(-30,0) 2(30,0)
  silkscreen extent -53,-23 61,23, body extent -31,-16 31,16, height 18
"M3 125X200"#1 [mil]
  round 200 hole 125: 1(0,0)
"M3 125X200"#2 [mil]
  round 200 hole 125: 1(-47,-8)
"M3 125X200"#3 [mil]
  round 200 hole 125: 1(62,-4)
"M3 125X200"#4 [mil]
  round 200 hole 125: 1(-84,-32)
QFN-20_L3.0-W3.0-P0.40-BL-EP1.7 [mm]
  rect 0.2x0.665 smd paste-100 mask+0.051: 1(-0.8,-1.22) 2(-0.4,-1.22) 3(0,-1.22) 4(0.4,-1.22) 5(0.8,-1.22) 11(0.8,1.595) 12(0.4,1.595) 13(0,1.595) 14(-0.4,1.595) 15(-0.8,1.595)
  rect 0.665x0.2 smd paste-100 mask+0.051: 6(1.407,-0.612) 7(1.407,-0.212) 8(1.407,0.188) 9(1.407,0.588) 10(1.407,0.988) 16(-1.407,0.988) 17(-1.407,0.588) 18(-1.407,0.188) 19(-1.407,-0.212) 20(-1.407,-0.612)
  rect 1.65x1.65 smd paste-100 mask+0.051: 21(0,0.188)
  silkscreen extent -1.58,-1.93 1.58,1.76
R0402_L [mm]
  rect 0.5x0.5 smd: 1(-0.425,0) 2(0.425,0)
  silkscreen extent -0.88,-0.46 0.87,0.46, body extent -0.5,-0.25 0.5,0.25, height 0.3
SH1.0-LT-7P [mm]
  rect 1.4x1.8 smd: 0(-4.401,-1.249) 0(4.401,-1.251)
  rect 0.6x1.9 smd: 1(2.999,1.251) 2(1.999,1.251) 3(0.999,1.251) 4(-0.001,1.251) 5(-1.001,1.251) 6(-2.001,1.251) 7(-3.001,1.251)
  silkscreen extent -4.4,-2.16 4.4,1.05, body extent -4.5,-2.03 4.5,1.57, height 4.25
SOD-123 [mil]
  rect 55x50 smd: 1(-67.5,0)
  oct 55x50 smd: 2(67.5,0)
  silkscreen extent -108,-35 112,35, body extent -73,-31 73,31, height 50
SOT23-3N [mm]
  rect 0.6x1.3 smd: 1(-0.95,-1.05) 2(0.95,-1.05) 3(0,1.05)
  silkscreen extent -1.92,-1.17 1.5,0.7, body extent -1.5,-1.2 1.5,1.2, height 1.05
SW-SMD_L3.9-W2.9-P4.15-LS5.0 [mm]
  rect 1.35x2 smd paste+0 mask+0.051: 1(-2.25,0) 2(2.25,0)
  silkscreen extent -2,-1.45 2,1.45
WSON-8_L8.0-W6.0-P1.27-TL-EP-1 [mm]
  rect 1x0.6 smd paste+0 mask+0.05: 1(-3.75,1.905) 2(-3.75,0.635) 3(-3.75,-0.635) 4(-3.75,-1.905) 5(4.05,-1.905) 6(4.05,-0.635) 7(4.05,0.635) 8(4.05,1.905)
  rect 3.4x4.3 smd paste+0 mask+0.05: 9(0.15,0)
  silkscreen extent -4.55,-3 4.15,3
XTAL-3215-2P [mm]
  rect 1.2x1.5 smd: 1(-1.65,0) 2(1.65,0)
  silkscreen extent -2.41,-0.89 2.41,0.89, body extent -1.6,-0.75 1.6,0.75, height 0.61
XTAL-3225-4P [mm]
  rect 1.3x1.2 smd: 1(-1.05,-0.85) 2(1.05,-0.85) 3(1.05,0.85) 4(-1.05,0.85)
  silkscreen extent -2.03,-1.75 1.91,1.65, body extent -1.6,-1.25 1.6,1.25, height 0.7

## Part data
3.3V BOOT PC13: library part LED, "贴片LED"
*1 *2 *3 *4: "铜柱孔"
C1 C2 C3 C4 C5 C6 C7 C8 C9 C10 C11 C12 C13 C14 C15 C16 C17 C18 C19 C20 C21 C22 C23 C24 C25 C26 C27 C28 C29 C30 C31 C32 C33 C34 C35 C36 C37 C38 C39 C40 C41 C42 C43 C44 C45 C46 C47 C48: library part C, "贴片电容/MLCC电容"
D1: "整流二极管"
D2: "两路肖特基二极管"
FB1: library part FB, "贴片磁珠"
JP1: library part "Header 7", "7P连接器"
L1 L2: library part L, "贴片小功率电感"
Q1 Q2: library part 8050-SMD, "高频放大-NPN型"
R1 R2 R3 R4 R5 R6 R7 R8 R9 R10 R11 R12 R13: library part R, "贴片电阻"
U1: "ARMÂ® CortexÂ®-M7 STM32H7 Microcontroller IC 32-Bit 480MHz 128KB (128K x 8) FLASH 240+25-TFBGA (14x14)"
U2: "SDRAM Memory IC 128Mb _4M x 32_ Parallel 167MHz 5.4ns 90-VFBGA _8x13_"
X1: library part XTAL-4P, "4脚无源晶振(谐振器）"
X2: library part XTAL-2P, "2脚无源晶振(谐振器）"

## Via types
v1: diameter 17.7, hole 7.9, Top Layer to Bottom Layer, tented both sides, 452 vias

## Nets (pads, with @x,y where several pads share a name; then routed paths per layer and width w, separated by ;. In a path a pad name is that pad's centre, name@x,y a point inside that pad or via, vN(x,y) a via of type N, cw(c..) or ccw(c..) an arc to the next point about the centre after c; other vN are vias at no path point)
+1.8: C4.1 C5.1 C6.1 C42.2 C46.1 L2.1 R12.1 U1.A6 U1.C17 U1.U12 | length 2659.7
  Top Layer w5: v1(387.76,783.76) 388.52,783.76 402.76,798.01 U1.U12@403.51,798.01 ; U1.C17@844.46,640.53 844.6,640.53 860.35,624.78 v1(860.5,624.78) ; U1.A6@907.45,986.98 908.49,986.98 914.23,992.72 917.75,992.72 v1(920.18,995.15)
  Top Layer w12: v1(963.4,1609.6) 964.3,1609.6 995.59,1578.31 995.59,1555.41 C42.2@998,1553
  Layer 2 w12: v1(387.76,783.76) 388.85,784.85 395.9,784.85 411.66,800.61 499.97,800.61 514,786.58 514,782 550,746 732,746 744,758 744,790 774,820 774,852 792,870 863,870 ; v1(860.5,624.78) 861.59,623.69 887.13,623.69 901.82,609 1150,609 1164,623 1200.97,623 1211,633.03 1211,944 1196,959 1152,959 ; v1(920.18,995.15) 900,974.97 900,907 863,870 ; v1(1000,1554) 1041,1513 1041,1070 1152,959 ; 863,870 885,848 1105,848 1115,858 1115,922 1152,959
+3.3: C7.2 C8.2 C9.2 C10.2 C11.2 C12.2 C13.2 C14.2 C15.2 C16.2 C17.2 C18.2 C19.2 C20.2 C21.2 C22.2 C23.2 C24.2 C25.2 C26.2 C27.2 C40.2 C41.2 C47.2 C48.2 D2.2 FB1.1 JP1.3 L1.1 R1.1 R2.2 R5.2 R7.1 R9.1 R11.1 SW1.1 U1.E6 U1.E9 U1.E11 U1.F5 U1.F17 U1.G5 U1.G13 U1.G17 U1.H5 U1.H13 U1.J13 U1.K5 U1.K13 U1.L5 U1.L13 U1.M5 U1.M13 U1.N7 U1.N8 U1.N10 U1.N11 U1.N12 U1.P17 U2.A7 U2.B2 U2.B7 U2.C9 U2.D9 U2.E1 U2.F9 U2.L1 U2.L7 U2.M9 U2.N9 U2.P2 U2.P7 U2.R7 U3.8 U5.4 U6.7 U6.8 | length 6054.3
  Top Layer w8.86: v1(483.3,624.49) 483.3,625.83 U1.P17@498,640.53 ; 512.62,815.39 515.38,815.39 U1.N11@529.5,829.5 ; 512.62,818.29 512.62,821.1 515.62,824.09 515.62,844.89 515.25,845.25 515.25,846.76 U1.N10@529.5,861 ; v1(515.5,939.74) 515.5,937.99 U1.N8@529.5,923.99 ; v1(515.5,971.24) 515.5,969.48 U1.N7@529.5,955.49 ; U1.N12@529.5,798.01 529.5,793.45 539.1,783.85 v1(539.1,782.85) ; v1(545.27,1034.28) 545.27,1034.2 U1.M5@560.99,1018.48 ; v1(605.15,1038.97) 607.54,1038.97 612.91,1033.6 614.05,1033.6 623.98,1023.67 U1.K5@623.98,1018.48 ; U1.G17@718.47,640.53 734.22,624.78 ; U1.F17@749.97,640.53 755.79,634.71 755.79,630.42 ; v1(768,983.92) 769.37,985.29 779.77,985.29 U1.E6@781.46,986.98 ; 789.34,900.37 789.34,902.23 795.09,907.98 v1(795.09,910.37)
  Top Layer w12: v1(233.46,1224.46) U3.8@235,1226 ; v1(250,1576) 321.59,1576 SW1.1@323.59,1578 ; v1(357,1514) 389.75,1481.25 421.59,1481.25 427.4,1475.44 D2.2@427.4,1461.66 ; v1(387.5,232.92) 372.53,232.92 ; U2.B2@404.02,96.51 404.5,96.04 414,96.04 v1(414.47,95.56) ; U2.B7@404.02,253.99 U2.A7@372.53,253.99 372.53,239.89 372.53,232.92 ; v1(439.02,347.9) 439.02,346.82 435.52,343.32 U2.C9@435.52,316.98 436.64,316.98 440.66,321 461.88,321 465.88,317 U2.D9@467.02,316.98 ; v1(462,6) 493.73,37.73 497.23,37.73 v1(498,38.5) 498.26,38.76 498.26,64.76 U2.E1@498.51,65.02 ; U1.N11@529.5,829.5 529.5,831.58 541.38,843.46 v1(541.38,845) 542,845.62 542,881.77 545.93,885.69 545.93,899.3 542,903.23 v1(542,937) ; U2.F9@530.01,316.98 530.75,317.73 530.75,339.96 v1(531.5,340.71) ; v1(535.89,3.52) 536.41,3 630.28,3 v1@632.14,1.14 ; U1.M13@560.99,766.51 U1.L13@592.49,766.51 U1.K13@623.98,766.51 623.98,781.13 624.73,781.87 ; U1.M5@560.99,1018.48 U1.L5@592.49,1018.48 608.24,1018.48 ; v1(578.32,781.87) 624.73,781.87 ; U1.K5@623.98,1018.48 608.24,1018.48 ; v1(673,992.05) 672.81,992.24 649.7,992.24 635.13,1006.81 v1(607,1006.81) 607.76,1007.58 607.76,1018.01 608.24,1018.48 ; v1(674,779) 671.13,781.87 647.93,781.87 ; U1.H5@686.98,1018.48 U1.G5@718.47,1018.48 739,1018.48 ; U2.L1@687.49,65.02 687.74,64.76 687.74,39.76 v1(688,39.5) ; v1(687.49,226.89) 687.49,239.88 U2.L7@687.49,253.99 ; v1@688.57,230.83 705.48,213.92 762.98,213.92 781.84,232.79 v1(781.89,232.79) ; v1@706,600 644,600 619.9,624.1 483.7,624.1 v1(483.3,624.49) 400,541.19 400,519.84 299.16,419 297,419 297,255.81 321.63,231.18 353.15,231.18 354.89,232.92 372.53,232.92 ; v1@710.75,600 722.63,611.87 722.63,612.91 734.5,624.78 ; v1(718,337) 718.19,336.81 718.19,317.78 U2.M9@718.98,316.98 720.11,316.98 724.74,321.62 744.72,321.62 749.36,316.98 U2.N9@750.48,316.98 v1(750.48,338.06) ; U1.G13@718.47,766.51 U1.H13@686.98,766.51 U1.J13@655.48,766.51 655.48,774.32 647.93,781.87 ; R5.2@719,1401 v1(719,1405) ; 734.22,624.78 734.5,624.78 ; v1(738,1005.81) 738.76,1006.58 738.76,1018.24 739,1018.48 ; U1.F5@749.97,1018.48 739,1018.48 ; 755.79,624.78 734.5,624.78 ; U1.E11@781.46,829.5 765.04,845.93 765.04,876.07 U1.E9@781.46,892.5 789.34,900.37 ; U2.P2@781.98,96.51 782.85,96.51 798.6,80.76 v1(799.47,80.76) ; v1@781.98,232.92 U2.P7@781.98,253.99 U2.R7@813.47,253.99 813.47,239.89 v1(813.47,232.92) 853,193.39 853,148.68 v1(853.37,148.31) ; FB1.1@784.54,1598 784.54,1596.03 793.31,1587.27 795.28,1587.27 796.54,1586 C48.2@836,1586 ; C48.2@835,1591 C48.2@835,1590 838.84,1586.16 853.29,1586.16 868.81,1570.65 868.81,1557.29 872.68,1553.41 U6.7@886.36,1553.41 ; v1(948.8,1379) L1.1@950.8,1377 950.8,1382.91 990,1422.1 R11.1@990,1434.27 ; v1(990.73,1434.27) R11.1@990.73,1436 996.46,1441.73 R9.1@1054,1441.73 1054.5,1442.23 1103.5,1442.23 R7.1@1104,1442.73 ; JP1.3@1307.33,319.33 v1(1309,321) ; 624.73,781.87 647.93,781.87
  Layer 3 w12: v1(439.02,347.9) 467.87,319.06 498.37,319.06 519.26,339.94 530.73,339.94 v1(531.5,340.71)
  Layer 4 w12: v1(319.19,147) 350.19,116 394.03,116 v1(414.47,95.56) ; v1(747.71,6.41) 748.79,6.41 765.6,23.22 779.9,23.22 795.27,38.6 795.27,75.48 799.47,79.68 v1(799.47,80.76) 837.56,118.85 837.56,131.41 853.37,147.22 v1(853.37,148.31)
  Bottom Layer w12: U5.4@95.47,484.24 96.55,483.16 122.84,483.16 v1(140,466) ; v1@233.46,1223 v1(233.46,1224.46) ; v1(319.19,147) 319.19,177.63 342.81,201.26 342.81,231 369.53,231 370.68,232.16 386.73,232.16 v1(387.5,232.92) 387.5,260.5 350,298 350,381.83 364.67,396.5 399.64,396.5 431.13,365.01 431.13,356.87 439.02,348.99 v1(439.02,347.9) ; v1(414.47,95.56) 414.47,60.59 416.67,58.39 416.67,24.95 431.44,10.19 457.81,10.19 v1(462,6) ; v1(483.3,624.49) 516.45,624.49 519.94,621 552,621 568.25,637.25 568.25,697.35 560.46,705.14 560.46,739.63 577.13,756.3 577.13,780.68 v1(578.32,781.87) 553.13,781.87 541.38,793.62 v1(541.38,845) ; v1(498,38.5) 498,35.53 528.92,4.61 534.8,4.61 v1(535.89,3.52) ; C27.2@540.19,908 540.19,938.94 542.19,940.94 542.19,971 543.08,971.89 543.08,989.08 560.81,1006.81 v1(607,1006.81) ; v1(635.93,-5.48) 657.33,15.92 659.78,15.92 671.97,28.11 687.11,28.11 688,29 688.89,28.11 699.5,28.11 722.13,5.49 C13.2@747.71,5.49 ; v1(651.35,1449.35) 652.44,1448.26 675.74,1448.26 v1(719,1405) 741.03,1427.03 741.03,1430.68 772.34,1462 865.8,1462 v1(948.8,1379) ; v1(673,992.05) 673.19,992.24 680.31,992.24 693.88,1005.81 C20.2@703,1005.81 ; v1(674,779) 674.31,778.69 737.5,778.69 738,778.19 ; v1(687.49,226.89) 688.25,227.66 688.25,249.13 715.4,276.27 715.4,310.49 717.23,312.32 717.23,324.28 ; C10.2@688,384.7 653.7,384.7 640,371 640,328.03 647.03,321 679.87,321 680.87,320 712.95,320 717.23,324.28 ; C20.2@703,1005.92 712.01,1005.92 712.12,1005.81 v1(738,1005.81) ; v1(706,595) 707.28,595 C7.2@733.28,621 ; C12.2@720.89,356.27 720,355.38 719.66,355.38 718.77,354.49 718.77,337.77 v1(718,337) 717.23,336.23 717.23,324.28 ; C22.2@747,1004.92 v1(768,983.92) 768,969.18 767.7,968.88 767.7,943.89 766.81,943 766.81,928.55 773.84,921.52 782.39,921.52 793.54,910.37 v1(795.09,910.37) ; v1(747.71,6.41) C13.2@747.71,5.49 ; C13.2@748,5.19 C13.2@747.71,5.49 ; v1@772,986 780.27,986 R1.1@798,1003.73 ; v1(813.47,232.92) 814.24,232.15 841.3,232.15 842.19,231.26 C9.2@842.19,231 ; v1(835,1589) 836.28,1589 936,1489.28 937.83,1489.28 C41.2@989,1438.11
  other v1: 1138,1477 1080,1478 1110,1478 1140,1504 1082,1505 1112,1505 1138,1530 1080,1531 1110,1531
+5: C43.2 C44.2 C45.2 JP1.2 U5.3 U5.5 U5.7 U5.9 U5.11 U6.18 U6.19 | length 2522.5
  Top Layer w12: v1(769,1432) 770.54,1432 C43.2@773,1429.54 775.31,1431.85 v1@793.85,1431.85 ; v1(774.72,1409.72) v1@794,1429 ; v1(794,1432) v1@796,1430 ; v1@795.54,1429.54 v1@796,1430 ; v1(817,1410) 820.57,1406.43 C44.2@825,1406.43 823.28,1408.16 823.28,1416.28 826.5,1419.5 862.95,1419.5 ; C44.2@819.22,1412.22 801.43,1430 v1@796,1430 ; U6.18@870.62,1442.59 868.81,1440.78 868.81,1425.35 862.95,1419.5 ; U6.19@886.36,1442.59 884.3,1440.52 884.3,1423.3 v1(878,1417) 876.91,1418.09 864.35,1418.09 862.95,1419.5 ; v1(961,90) 1201.05,90 1346.7,235.65 1346.7,318.75 JP1.2@1349.43,321.48
  Bottom Layer w12: U5.11@-95.47,562.98 U5.9@-95.47,543.3 ; v1(-46,523) -46.61,523.61 U5.7@-95.47,523.61 ; v1(-29,505) -30.07,503.93 U5.5@-95.47,503.93 ; v1(-25,541) -27.3,543.3 U5.9@-95.47,543.3 ; v1@957,90 786,-81 301,-81 -65,285 -65,401.9 -46,420.9 v1(-46,485) -46.76,484.24 U5.3@-95.47,484.24 U5.5@-95.47,503.93 ; U5.5@-95.47,503.93 U5.7@-95.47,523.61 ; U5.7@-95.47,523.61 U5.9@-95.47,543.3
  other v1: -66,504 -65,543 794,1407 849.74,1416.7 819,1433
BOOT0: BOOT.1 Q2.2 R6.2 U1.E8 U4.1 | length 2573.2
  Top Layer w5: BOOT.1@604,1402 612.5,1410.5 628.81,1410.5 641.3,1423 652.61,1423 666.7,1437.09 666.7,1468.89 650.6,1484.99 Q2.2@650.6,1538.68 ; Q2.2@653,1522.5 659.91,1515.59 693.89,1515.59 707.48,1502 741.46,1502 755.16,1515.69 767.66,1515.69 R6.2@769.04,1517.07 ; v1(741.99,1357.57) 741.99,1366.66 v1(742.98,1367.65) ; v1@742.5,1367.65 742.5,1374.29 745,1376.79 745,1485.73 R6.2@775,1515.73 ; U1.E8@781.46,923.99 781.76,923.99 796.92,939.15 v1(797.21,939.15)
  Layer 2 w5: v1(741.99,1357.57) 742.5,1357.06 742.5,1341.22 745,1338.72 745,1222 770,1197 928,1197 944,1181 944,1048 916,1020 881,1020 835.74,974.74 835.74,945.74 829.15,939.15 v1(797.21,939.15)
  Bottom Layer w5: v1(742.98,1367.65) 743.21,1367.88 755.88,1367.88 758.93,1370.93 763.07,1370.93 809,1325 1057,1325 1079,1303 1079,1203 1183,1203 1251.19,1134.81 1251.19,1084.13 1259,1076.33 1259,491.31 1232.25,464.56 U4.1@1214.53,464.56
"FMC_A0 / PF0": U1.G4 U2.G8 | length 1786.5
  Top Layer w5: U2.G8@561.5,285.49 561.73,285.49 v1(573.3,297.06) ; U1.G4@718.47,1049.98 719.21,1049.24 725.97,1049.24 728.94,1046.27 v1(731.92,1046.27)
  Layer 4 w5: v1(573.3,297.06) 573.77,297.06 579,291.83 579,289.55 596.19,272.35 646.06,272.35 656.1,282.39 748.61,282.39 750,281 844.86,281 859,295.14 859,381 844,396 844,631.61 842.2,633.41 842.2,663.11 851.05,671.95 868.49,671.95 906.63,710.1 924.82,710.1 951.2,736.48 951.2,741.56 951.2,744.06 ccw(c945.2,744.06) 945.2,750.06 942,750.06 cw(c942,756.06) 942,762.06 963.44,762.06 ccw(c963.44,768.06) 963.44,774.06 942,774.06 cw(c942,780.06) 942,786.06 963.44,786.06 ccw(c963.44,792.06) 963.44,798.06 942,798.06 cw(c942,804.06) 942,810.06 963.44,810.06 ccw(c963.44,816.06) 963.44,822.06 941.36,822.06 cw(c941.36,828.06) 941.36,834.06 945.2,834.06 ccw(c945.2,840.06) 951.2,840.06 951.2,857 942.96,865.23 942.96,866.73 940.88,868.81 936.7,873 932.38,873 ccw(c932.38,867) 926.38,867 926.38,866.1 cw(c920.38,866.1) 914.38,866.1 914.38,887 ccw(c908.38,887) 902.38,887 902.38,866.1 cw(c896.38,866.1) 890.38,866.1 890.38,887 ccw(c884.38,887) 878.38,887 878.38,866.07 cw(c872.38,866.07) 866.38,866.07 866.38,887 ccw(c860.38,887) 854.38,887 854.38,866.1 cw(c848.38,866.1) 842.38,866.1 842.38,887 ccw(c836.38,887) 830.38,887 830.38,866.1 cw(c824.38,866.1) 818.38,866.1 818.38,867 ccw(c812.38,867) 812.38,873 790,873 780.24,882.76 780.24,947.68 782.85,950.3 782.85,993.76 750.72,1025.89 750.72,1046 744.94,1051.78 741.52,1048.37 734.02,1048.37 v1(731.92,1046.27)
"FMC_A1 / PF1": U1.G3 U2.G9 | length 1775.1
  Top Layer w5: U2.G9@561.5,316.98 562,317.48 562,337.56 v1(562.5,338.06) ; U1.G3@718.47,1081.47 718.47,1081.97 731.15,1094.65 v1(731.15,1095.15)
  Layer 4 w5: v1(562.5,338.06) 562.5,339.05 577.95,354.5 597.5,354.5 620,377 620,535.56 610.89,544.67 610.89,559.89 v1@611,560
  Bottom Layer w5: v1(610.89,561.65) 645,527.54 652,527.54 654.5,527.54 ccw(c654.5,533.54) 660.5,533.54 660.5,551.54 cw(c666.5,551.54) 672.5,551.54 672.5,503.54 ccw(c678.5,503.54) 684.5,503.54 684.5,550 cw(c690.5,550) 696.5,550 696.5,503.54 ccw(c702.5,503.54) 708.5,503.54 708.5,550 cw(c714.5,550) 720.5,550 720.5,503.54 ccw(c726.5,503.54) 732.5,503.54 732.5,542.2 cw(c738.5,542.2) 744.5,542.2 744.5,533.54 ccw(c750.5,533.54) 750.5,527.54 764.67,527.54 780.54,527.54 783,530 807,530 ; v1(731.15,1095.15) 714.25,1078.25 691.02,1078.25 684.2,1085.07 659.07,1085.07 642,1068 642,609 685,566 766,566 778,554 799,554 819,534 825.07,534 828,531.07 828,477.21 825.07,474.28 818.93,474.28 816,477.21 816,522 807.5,530.5
"FMC_A2 / PF2": U1.G1 U2.F7 | length 1760.8
  Top Layer w5: U2.F7@530.01,253.99 530.75,253.25 530.75,233.67 v1(531.5,232.92) ; U1.G1@718.47,1144.46 732.12,1158.11 732.12,1163.75 v1(734.22,1165.85)
  Bottom Layer w5: v1(531.5,232.92) 531.5,231.43 559.46,203.46 609.88,203.46 611.99,201.35 904.35,201.35 1030,327 1030,1140.27 981.43,1188.85 978.77,1191.5 749.99,1191.5 744.17,1185.69 744.17,1178.67 734.22,1168.72 v1(734.22,1165.85)
"FMC_A3 / PF3": U1.H4 U2.F3 | length 1798.6
  Top Layer w5: U2.F3@530.01,128.01 527.88,130.14 527.88,135.85 527.22,136.51 527.22,143.74 530.02,146.54 v1(530.01,149.5) ; U1.H4@686.98,1049.98 v1(700.04,1050.01)
  Bottom Layer w5: v1(530.01,149.5) 527.48,149.47 509.2,131.2 407.96,131.2 405.03,134.12 405.03,195.04 407.96,197.97 454.04,197.97 482.52,226.44 482.52,250.93 475.5,257.95 475.5,282.45 482.52,289.47 482.52,307.85 464.27,326.1 464.27,400.8 514.45,450.98 869.01,450.98 922.99,504.96 922.99,538.95 842.21,619.73 842.21,664.01 831.91,674.31 701.2,674.31 699.69,672.8 661.14,672.8 653.03,680.91 653.03,1003.81 663.02,1013.8 677.64,1013.8 687.62,1023.79 687.62,1037.53 v1@700.07,1049.97
"FMC_A4 / PF4": U1.J5 U2.G1 | length 1803.6
  Top Layer w5: U2.G1@561.75,65.02 563.64,63.13 563.64,56.7 563.82,56.52 563.82,50.11 563.68,49.97 563.68,39.87 v1(562,38.19) ; U1.J5@655.48,1018.48 656.52,1018.48 658.45,1020.41 660.1,1020.41 670.76,1031.06 v1(670.96,1031.06)
  Layer 3 w5: v1(562,38.19) 564.8,38.19 579.63,23.35 864,23.35 901.23,60.58 970.55,129.9 970.55,434.81 978.5,442.76 v1(978.5,443.24)
  Bottom Layer w5: v1(670.96,1031.06) 670.96,1033.44 675.06,1037.53 675.06,1038.29 676.62,1039.86 676.62,1048.69 695.33,1067.39 748.27,1067.39 761.14,1080.26 863.24,1080.26 866.49,1077.01 915.32,1077.01 916.74,1078.43 965.57,1078.43 996,1048 996,462.18 978.5,444.68 v1(978.5,443.24)
"FMC_A5 / PF5": U1.J4 U2.G2 | length 1792.9
  Top Layer w5: U2.G2@561.5,96.51 561.5,93.5 566.16,88.84 566.16,86.94 570,83.1 575.9,83.1 v1(578,81) ; U1.J4@655.48,1049.98 666.15,1049.98 669.08,1052.91 669.08,1058.7 675.85,1065.48 v1(675.85,1068.91)
  Layer 4 w5: v1(578,81) 592,95 601.77,95 602.77,96 623.92,96 671.5,143.58 671.5,155.43 695.23,179.17 812.17,179.17 818,185 818,191.07 820.93,194 826.07,194 829,191.07 829,185 834.83,179.17 840.07,179.17 843,182.09 843,192 845.93,194.93 850.07,194.93 855,190 855,183.93 857.93,181 882,181 901.23,200.23 977,276 977,416 962,431 962,548.61 979.94,566.55 981.43,568.04 1013,599.61 1013,957.67 981.43,989.24 955.2,1015.47 955.2,1037.47 953.5,1039.17 953.5,1111.85 950.57,1114.78 691.11,1114.78 688.18,1111.85 688.18,1088.06 688.63,1087.6 688.63,1077.49 685.1,1073.95 684.33,1073.95 679.29,1068.91 v1(675.85,1068.91)
"FMC_A6 / PF12": U1.R7 U2.G3 | length 1768.1
  Top Layer w5: v1(450.03,962.97) 452.46,960.54 460.41,960.54 465.46,955.49 U1.R7@466.5,955.49 ; U2.G3@561.5,128.01 v1(561.5,149.5)
  Bottom Layer w5: v1(450.03,962.97) 446.59,962.97 440.62,957 429,957 425.15,953.15 412.85,953.15 409,957 376,957 345,926 345,566 345,542.5 ccw(c351,542.5) 351,536.5 352.89,536.5 cw(c352.89,530.5) 352.89,524.5 351,524.5 ccw(c351,518.5) 351,512.5 356.4,512.5 cw(c356.4,506.5) 356.4,500.5 351,500.5 ccw(c351,494.5) 351,488.5 389.38,488.5 cw(c389.38,482.5) 389.38,476.5 351,476.5 ccw(c351,470.5) 351,464.5 413.38,464.5 cw(c413.38,458.5) 413.38,452.5 351,452.5 ccw(c351,446.5) 351,440.5 439,440.5 cw(c439,434.5) 439,428.5 351,428.5 ccw(c351,422.5) 345,422.5 345,413 334,402 275,343 275,121 287.52,108.48 347.48,108.48 360.06,121.06 533.49,121.06 561.5,149.08 v1(561.5,149.5)
"FMC_A7 / PF13": U1.P7 U2.H1 | length 1766
  Top Layer w5: v1(482.5,968.45) 483.99,968.45 496.96,955.49 U1.P7@498,955.49 ; v1(593,38.85) U2.H1@593,65.02
  Bottom Layer w5: 456,-38 515.44,-38 539.77,-13.68 541.24,-13.68 565.57,10.65 565.57,11.07 593,38.5 v1(593,38.85) ; 456,-37 444,-37 425.8,-18.8 419.23,-12.23 407.77,-12.23 383,12.54 383,59 360,82 271,82 249,104 249,368 290,409 290,417 290,419.5 ccw(c284,419.5) 284,425.5 276,425.5 cw(c276,431.5) 276,437.5 290.71,437.5 ccw(c290.71,443.5) 290.71,449.5 276,449.5 cw(c276,455.5) 276,461.5 290.71,461.5 ccw(c290.71,467.5) 290.71,473.5 276,473.5 cw(c276,479.5) 276,485.5 290.71,485.5 ccw(c290.71,491.5) 290.71,497.5 283.8,497.5 cw(c283.8,503.5) 283.8,509.5 290.71,509.5 ccw(c290.71,515.5) 290.71,521.5 276,521.5 cw(c276,527.5) 276,533.5 284,533.5 ccw(c284,539.5) 290,539.5 290,542 311.68,563.68 323.5,575.5 323.5,955 358.15,989.65 407.63,989.65 409.33,991.35 428.67,991.35 430.37,989.65 470,989.65 474.5,985.15 474.5,979.89 482.5,971.89 v1(482.5,968.45)
"FMC_A8 / PF14": U1.P8 U2.H2 | length 1825.1
  Top Layer w5: v1(482.5,939.74) 482.5,939.62 498,924.12 U1.P8@498,923.99 ; U2.H2@593,96.51 593.09,96.51 609.1,80.5 v1(609.19,80.5)
  Layer 3 w5: v1(482.5,939.74) 464.03,939.74 455.65,948.12 432.71,948.12 426.42,954.41 425.15,953.15 412.85,953.15 411.26,954.74 379,954.74 367,966.74 367,1012.07 364.07,1015 317,1015 307.5,1015 cw(c307.5,1021) 301.5,1021 301.5,1029 ccw(c295.5,1029) 289.5,1029 289.5,1001 cw(c283.5,1001) 277.5,1001 277.5,1029 ccw(c271.5,1029) 265.5,1029 265.5,1001 cw(c259.5,1001) 253.5,1001 253.5,1029 ccw(c247.5,1029) 241.5,1029 241.5,1021 cw(c235.5,1021) 235.5,1015 233,1015 211.93,1015 209,1012.07 209,196 250,155 287,155 373.5,68.5 383.56,68.5 387.56,64.5 593.5,64.5 609.19,80.19 v1(609.19,80.5)
"FMC_A9 / PF15": U1.R9 U2.J3 | length 1768.5
  Top Layer w5: v1(450.76,903.57) 453.19,901.14 457.86,901.14 U1.R9@466.5,892.5 ; U2.J3@624.5,128.01 v1(624.5,149.5)
  Bottom Layer w5: 334.5,609.5 335,610 335,949.46 363.36,977.82 407.82,977.82 412.85,982.85 425.15,982.85 430.18,977.82 463.07,977.82 466,974.89 466,923.49 461.23,918.72 461.23,915.18 450.76,904.71 v1(450.76,903.57) ; 335,609 335,563 335,539.5 cw(c329,539.5) 329,533.5 311,533.5 ccw(c311,527.5) 311,521.5 330,521.5 cw(c330,515.5) 330,509.5 311,509.5 ccw(c311,503.5) 311,497.5 330,497.5 cw(c330,491.5) 330,485.5 311,485.5 ccw(c311,479.5) 311,473.5 330,473.5 cw(c330,467.5) 330,461.5 311,461.5 ccw(c311,455.5) 311,449.5 330,449.5 cw(c330,443.5) 330,437.5 311,437.5 ccw(c311,431.5) 311,425.5 322.02,425.5 cw(c322.02,419.5) 326.26,415.26 322,411 264,353 264,116 285,95 346.02,95 361.08,110.06 375.55,110.06 376.55,111.06 586.48,111.06 624.5,149.08 v1(624.5,149.5)
"FMC_A10 / PG0": U1.T8 U2.G7 | length 1792.9
  Top Layer w5: v1(180.65,200) 284.77,200 528.58,200 v1(561.5,232.92) 561.5,239.88 U2.G7@561.5,253.99 ; v1(307.41,921.59) 309.46,923.63 323.76,923.63 342.94,942.81 397.91,942.81 398.16,942.56 400.39,942.56 403.76,939.19 418.31,939.19 419.26,938.24 420.01,938.24 434.26,923.99 U1.T8@435.01,923.99
  Bottom Layer w5: v1(180.65,200) 182,201.35 182,508 268,594 268,689 283,704 283,718 283,720.5 ccw(c277,720.5) 277,726.5 270,726.5 cw(c270,732.5) 270,738.5 291,738.5 ccw(c291,744.5) 291,750.5 270,750.5 cw(c270,756.5) 270,762.5 284.65,762.5 ccw(c284.65,768.5) 284.65,774.5 270,774.5 cw(c270,780.5) 270,786.5 287.79,786.5 ccw(c287.79,792.5) 287.79,798.5 270,798.5 cw(c270,804.5) 270,810.5 308.5,810.5 ccw(c308.5,816.5) 308.5,822.5 270,822.5 cw(c270,828.5) 270,834.5 308.5,834.5 ccw(c308.5,840.5) 308.5,846.5 270,846.5 cw(c270,852.5) 270,858.5 308.5,858.5 ccw(c308.5,864.5) 308.5,870.5 270.49,870.5 cw(c270.49,876.5) 270.49,882.5 298,882.5 ccw(c298,888.5) 304,888.5 304,911 304.98,911.98 304.98,919.16 v1(307.41,921.59)
"FMC_A11 / PG1": U1.U8 U2.H9 | length 1784.8
  Top Layer w5: v1(591.99,339) 592.49,338.49 592.49,317.49 U2.H9@593,316.98
  Layer 4 w5: v1(392.59,927.03) 423.81,927.03 432.42,918.42 536.07,918.42 539,915.49 539,871 544.69,865.31 582.89,865.31 594.82,853.38 594.82,775.04 585.16,765.37 540.37,765.37 534,759 534,742 539.93,736.07 544.07,736.07 547,739 547,751 550,754 557.07,754 560,751.07 560,739.93 562.93,737 564,737 565.23,735.77 569.37,735.77 573,739.39 573,751.07 575.93,754 582,754 588,748 588,739.31 591.55,735.77 595.69,735.77 596.65,736.73 597.07,736.73 599,738.65 599,755 602,758 607,758 612,753 612,740 619.98,732.02 619.98,713.39 612.62,706.03 612.62,694.13 601.9,683.4 596.58,683.4 592,678.82 592,672.93 589.07,670 583.93,670 581,672.93 581,681 575,687 575,695.07 572.07,698 570.86,698 570.07,698.79 565.93,698.79 563,695.86 563,685.86 560.07,682.93 554,682.93 554,698.02 550.07,701.95 545.93,701.95 543,699.02 543,682 553.43,671.57 560.43,671.57 571,661 605,661 617,649 617,585.93 614.07,583 607.93,583 605,585.93 605,633 600.93,633 598,630.07 598,630 596,628 596,619 590,613 590,599 584,593 577,593 574,596 574,612 584,622 584,631 587,634 587,645 585,647 585,648 582.07,650.93 577.93,650.93 575,648 575,629 564,618 564,597.93 561.07,595 552.93,595 550,597.93 550,620 564,634 564,650 560,654 555.18,654 552.25,651.07 552.25,640.33 539,627.08 539,589 543.93,584.07 586.07,584.07 586.07,579.93 594.39,571.61 594.39,545.61 609,531 609,386 591,368 577.31,368 564.31,355 553,355 547,349 547,325.48 549.93,322.56 575.54,322.56 v1(591.99,339)
"FMC_BA0 / PG4": U1.H14 U2.J7 | length 1800.1
  Top Layer w5: v1(624.5,216.85) 624.5,239.88 U2.J7@624.5,253.99 ; U1.H14@686.98,735.02 686.98,733.97 700.6,720.35 v1(700.6,717.14)
  Layer 3 w5: v1(624.5,216.85) 625.61,216.85 636.01,206.45 639.55,206.45 647,199 667,199 679,211 684,211 690,205 690,201.93 692.93,199 700.07,199 703,201.93 703,214.07 705.93,217 714,217 717,214 717,198 723,192 728.07,192 731,194.93 731,217.07 733.93,220 740,220 746,214 746,201 748.93,198.07 753.07,198.07 757,202 757,214 762,219 767,219 771,215 771,206.93 773.93,204 780,204 785,209 785,214.36 787.93,217.29 793.29,217.29 798,212.58 798,208 801.93,204.07 806.07,204.07 809,207 809,213 811.93,215.93 816.07,215.93 821,211 821,206 825,202 827.83,202 834,208.17 834,236.07 836.93,239 843,239 847,235 847,214 850.07,210.93 850.07,196.07 853,193.14 855.93,193.14 863.07,186 867.21,186 877.07,176.14 884.07,176.14 887.53,179.6 887.53,188.07 884.6,191 879,191 872,198 864,198 859.07,202.93 859.07,207.07 863,211 877,211 886.53,220.53 886.53,558.53 925,597 925,605.35 922.07,608.28 906.28,608.28 886,588 878.74,580.74 cw(c874.5,584.98) 868.5,584.98 868.5,598 ccw(c862.5,598) 856.5,598 856.5,571 cw(c850.5,571) 844.5,571 844.5,598 ccw(c838.5,598) 832.5,598 832.5,571 cw(c826.5,571) 820.5,571 820.5,598 ccw(c814.5,598) 808.5,598 808.5,580 cw(c802.5,580) 802.5,574 778.71,574 772.62,580.09 772.62,633.38 767.98,638.02 766.22,639.78 759.78,639.78 755,635 755,572 751.07,568.07 746.93,568.07 743,572 743,632.07 740.07,635 735.93,635 733,632.07 733,594 729.97,590.97 725.83,590.97 722.9,593.9 722.9,664.91 719.22,668.59 719.22,702.77 714.35,707.64 713.54,707.64 704.03,717.14 v1(700.6,717.14)
"FMC_BA1 / PG5": U1.G14 U2.H8 | length 1825.3
  Top Layer w5: U2.H8@593,285.49 593.75,286.24 593.75,295.22 v1(594.5,295.97) ; U1.G14@718.47,735.02 v1(734.22,719.27)
  Layer 3 w5: v1(594.5,295.97) 596.6,293.86 596.6,284.37 582.76,284.37 579.95,281.56 514.56,281.56 510.07,277.07 510.07,272.93 513,270 566,270 567,269 594.07,269 597,266.07 597,261.93 594.07,259 514.93,259 512,256.07 512,251.93 518.93,245 521.66,245 525.08,248.42 535.58,248.42 536,248 554.66,248 555.08,248.42 571.58,248.42 577,243 577,223 569,215 566.93,215 566,214.07 566,201 572,195 607.07,195 610,197.93 610,204.07 607.07,207 587.93,207 585,209.93 585,214.07 587.93,217 590,217 593,220 603.07,220 606,222.93 606,229.07 603.07,232 592.93,232 590,234.93 590,243.07 592.93,246 599,246 600,247 606,247 617,236 622.07,236 625,238.93 625,255.07 627.93,258 634,258 639,253 639,236.93 641.93,234 651.07,234 654,236.93 654,242 655,243 655,251.5 657.93,254.43 662.07,254.43 662.5,254 763,254 768,249 863,249 875.53,261.53 875.53,375.55 870.07,381 853,381 844,390 844,395.07 846.93,398 869,398 874,403 874,409.07 872.07,411 844.43,411 840,415.43 840,419.57 842.93,422.5 865.57,422.5 869.09,426.02 870.02,426.02 875.53,431.53 875.53,545.47 867,554 732.44,554 722.44,564 713.86,564 710.93,561.07 710.93,556.93 708,554 697.11,554 665.56,585.56 665.56,594.07 668.49,597 684,597 687,600 687,606 683,610 666.93,610 664,612.93 664,617.07 666.93,620 668,620 671,623 682,623 684.93,625.93 684.93,630.07 681,634 681,642.94 685.75,647.69 685.75,725.75 695.77,735.77 717.72,735.77 v1(734.22,719.27)
"FMC_D0 / PD14": U1.P16 U2.R8 | length 1834.8
  Top Layer w5: v1(480.75,656.28) 481.5,656.28 497.25,672.02 U1.P16@498,672.02 ; U2.R8@813.47,285.49 813.98,285.49 828.31,299.81 v1(828.82,299.81)
  Layer 3 w5: v1(480.75,656.28) 480.75,653.3 486.25,647.8 486.25,644.88 495,636.13 499.8,631.33 499.8,617.66 432.15,550 424.11,550 421.11,547 321,547 300,526 300,461.93 302.93,459 313.07,459 316,461.93 316,517 319,520 327,520 330,517 330,416 311,397 311,391 310,390 310,330.07 313.93,326.14 318.07,326.14 321,329.07 321,382 325,386 325,393 342,410 342,517.07 344.93,520 354.07,520 357,517.07 357,399.93 354.07,397 348,397 338,387 338,370.93 340.93,368 352,368 354.93,365.07 354.93,358.53 349.4,353 333.93,353 331,350.07 331,339.93 333.93,337 357.15,337 363.08,331.07 363.08,326.93 360.15,324 334,324 331,321 331,311.93 333.93,309 368,309 371,306 371,301 369.93,299.93 369.93,298.93 366,295 366,290.86 376.44,280.41 473.44,280.41 482.52,289.49 482.52,293.15 494.69,305.32 503.73,305.32 515.91,317.5 600.5,317.5 610,308 610,285.12 627.12,268 655.8,268 657.3,266.5 712.42,266.5 714.92,269 732,269 749.9,286.9 749.9,311.9 756,318 813,318 828.82,302.19 v1(828.82,299.81)
"FMC_D1 / PD15": U1.P15 U2.N7 | length 1773.9
  Top Layer w5: v1(482.25,687.77) U1.P15@498,703.52 ; v1(750.48,232.92) 750.48,239.88 U2.N7@750.48,253.99
  Layer 4 w5: v1(482.25,687.77) 482.25,684.8 487.75,679.3 487.75,676.69 497.25,667.2 497.25,642.78 500.26,639.77 500.26,611.26 460,571 346,571 314,539 315,538 315,435 309.54,429.54 309.54,424 312,424 317.93,418.07 317.93,413.93 315,411 302,411 299,408 299,400.93 301.93,398 314,398 319,393 319,387 316,384 300.93,384 298,381.07 298,372 301,369 314,369 319,364 319,357.93 315.07,354 314,354 301,341 301,312 303.93,309.07 308.07,309.07 317,318 317,336 321,340 327.07,340 330,337.07 330,313 300,283 300,274 302.93,271.07 307.07,271.07 342,306 342,315 347,320 347,338.07 350.93,342 361.07,342 366,337.07 366,324 354.46,312.46 354.46,299.46 314,259 303,259 298,254 298,245.93 300.93,243 314.76,243 318.69,239.07 318.69,234.93 315.76,232 303,232 298,227 298,221 301.58,217.42 319.07,217.42 322,220.35 322,223 331,232 333.24,232 347,245.76 347,247 362,262 362,263 374,275 381,275 384.93,271.07 384.93,266.93 345,227 345,221.93 349.51,217.42 358.42,217.42 363,222 363,230.34 386.66,254 398,254 407,245 407,227 416.58,217.42 476.27,217.42 488,229.15 488,239.42 490.93,242.35 496.07,242.35 499,239.42 499,222 503.58,217.42 567.92,217.42 592.86,242.35 658.49,242.35 668.53,252.39 731.01,252.39 v1(750.48,232.92)
"FMC_D2 / PD0": U1.D13 U2.R9 | length 1766.5
  Top Layer w5: U1.D13@812.96,766.51 813.52,766.51 829.18,750.85 v1(829.74,750.85) ; U2.R9@813.47,316.98 v1(813.47,338.06)
  Layer 4 w5: v1(813.47,338.06) 810.5,338.06 803.55,345 779.5,345 768.5,356 741,356 738.07,358.93 738.07,363.07 744,369 774,369 774.93,368.07 779.07,368.07 782,371 782,377.07 779.07,380 747,380 742.07,384.93 742.07,389.07 746,393 776.07,393 787,403.93 787,406.43 ccw(c781,406.43) 781,412.43 735.99,412.43 cw(c735.99,418.43) 735.99,424.43 827,424.43 ccw(c827,430.43) 827,436.43 735.99,436.43 cw(c735.99,442.43) 735.99,448.43 827,448.43 ccw(c827,454.43) 827,460.43 735.99,460.43 cw(c735.99,466.43) 735.99,472.43 827,472.43 ccw(c827,478.43) 827,484.43 735.99,484.43 cw(c735.99,490.43) 735.99,496.43 827,496.43 ccw(c827,502.43) 827,508.43 735.99,508.43 cw(c735.99,514.43) 735.99,520.43 827,520.43 ccw(c827,526.43) 827,532.43 735.99,532.43 cw(c735.99,538.43) 735.99,544.43 781,544.43 ccw(c781,550.43) 787,550.43 787,569 788,570 788,570.07 790.93,573 811,573 830.55,592.55 830.55,627.09 821.34,636.3 820.04,636.3 809.2,647.13 809.2,662.86 835.08,688.74 835.08,727.91 832.1,730.89 832.1,748.49 v1(829.74,750.85)
"FMC_D3 / PD1": U1.E12 U2.N8 | length 1797.1
  Top Layer w5: U2.N8@750.48,285.49 v1(767,302) ; U1.E12@781.46,798.01 v1(797.21,782.26)
  Layer 3 w5: v1(767,302) 767,282 786,263 852.07,263 864.53,275.45 864.53,350 826,388.53 826,413 826,415.5 ccw(c820,415.5) 820,421.5 751.42,421.5 cw(c751.42,427.5) 751.42,433.5 858.53,433.5 ccw(c858.53,439.5) 858.53,445.5 770,445.5 cw(c770,451.5) 770,457.5 858.53,457.5 ccw(c858.53,463.5) 858.53,469.5 770,469.5 cw(c770,475.5) 770,481.5 858.53,481.5 ccw(c858.53,487.5) 858.53,493.5 770,493.5 cw(c770,499.5) 770,505.5 858.53,505.5 ccw(c858.53,511.5) 858.53,517.5 832,517.5 cw(c832,523.5) 826,523.5 826,537 820,543 692.44,543 674,561.44 674,561.56 652.98,582.57 652.98,767.98 657.5,772.5 657.5,785.83 667.17,795.5 680.83,795.5 690.5,785.83 690.5,782.26 v1(797.21,782.26)
"FMC_D4 / PE7": U1.U9 U2.P9 | length 1780.7
  Top Layer w5: v1(386.26,905.72) 389.24,905.72 394.04,910.53 400.58,910.53 403.51,907.6 U1.U9@403.51,892.5 ; v1@565.95,485.95 565.95,441.05 571.05,435.95 581,426 586.5,426 ccw(c586.5,432) 592.5,432 592.5,442.6 cw(c598.5,442.6) 604.5,442.6 604.5,406.8 ccw(c610.5,406.8) 616.5,406.8 616.5,450 cw(c622.5,450) 628.5,450 628.5,406.8 ccw(c634.5,406.8) 640.5,406.8 640.5,450 cw(c646.5,450) 652.5,450 652.5,406.8 ccw(c658.5,406.8) 664.5,406.8 664.5,450 cw(c670.5,450) 676.5,450 676.5,406.8 ccw(c682.5,406.8) 688.5,406.8 688.5,450 cw(c694.5,450) 700.5,450 700.5,406.8 ccw(c706.5,406.8) 712.5,406.8 712.5,450 cw(c718.5,450) 724.5,450 724.5,406.8 ccw(c730.5,406.8) 736.5,406.8 736.5,450 cw(c742.5,450) 748.5,450 748.5,406.8 ccw(c754.5,406.8) 760.5,406.8 760.5,420 cw(c766.5,420) 766.5,426 769,426 781.95,413.05 U2.P9@781.95,317.01
  Bottom Layer w5: v1(386.26,905.72) 398.46,905.72 425.04,879.13 628.02,879.13 630.95,876.2 630.95,640.72 602.95,612.72 572.95,612.72 560.65,600.42 560.65,557.32 565.95,552.02 v1@565.95,486.05
  other v1: 566,486